# Allegro board fmc_tlu_v1_15.brd
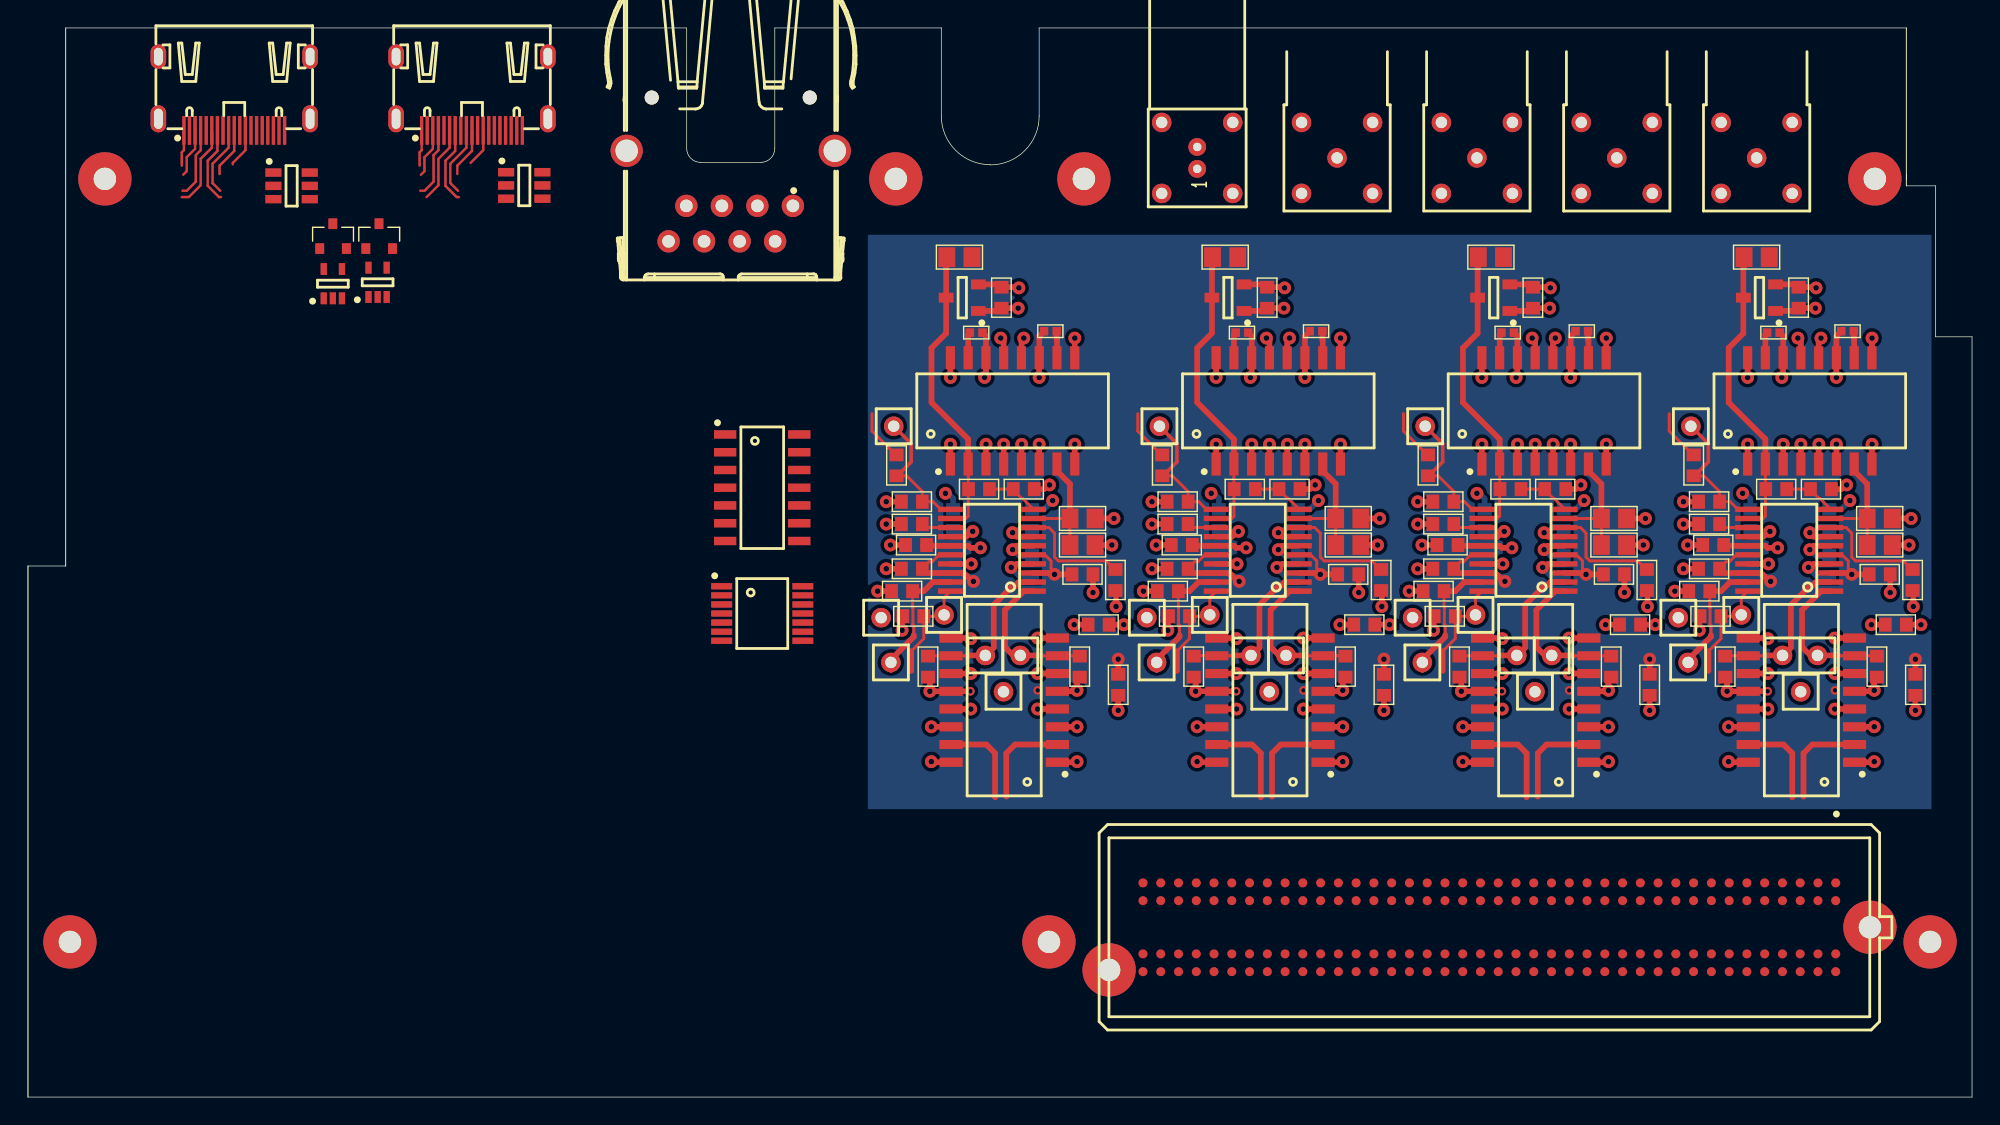
[diagram p0: board, top side]
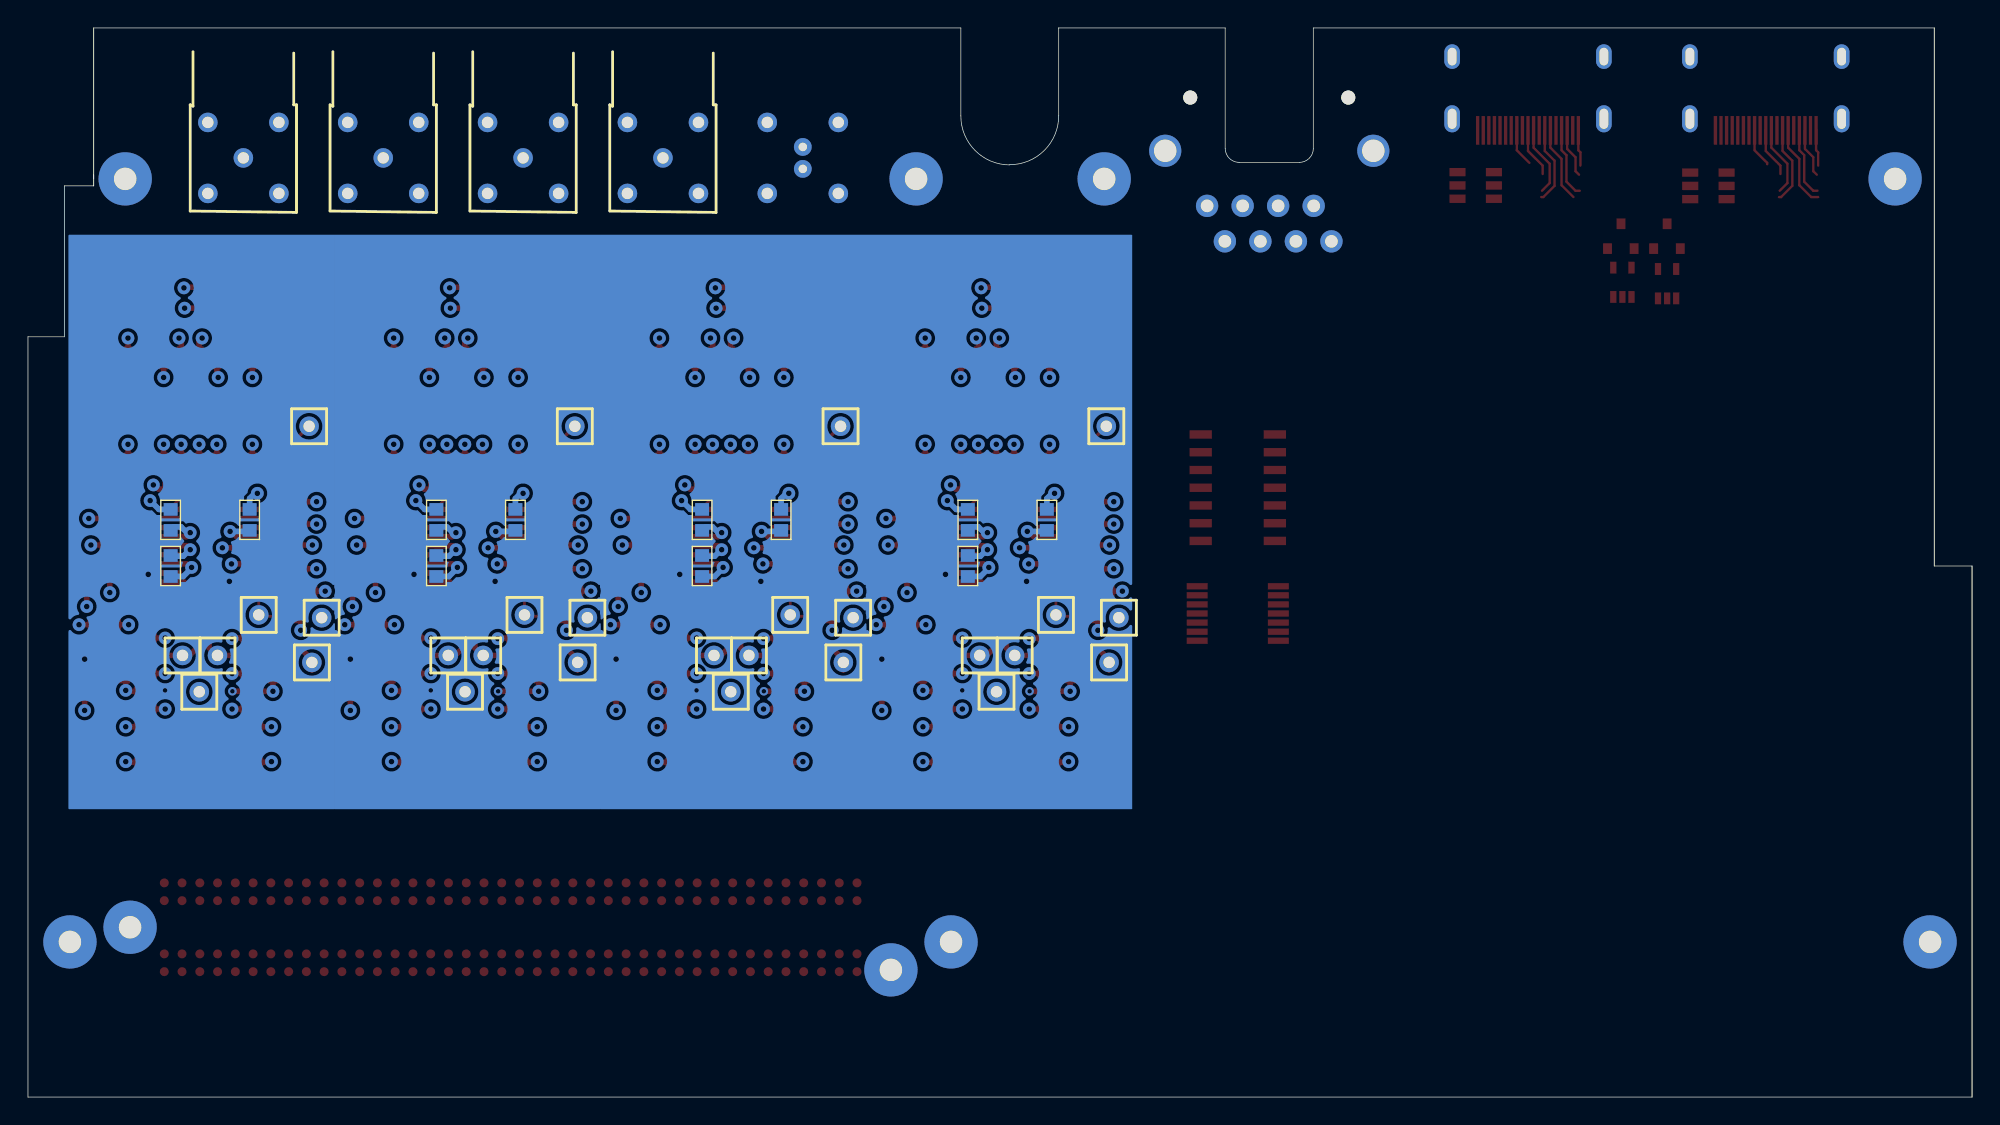
[diagram p1: board, bottom side, seen from below]

Outline 139 x 76.5 mm; copper layers: TOP, LAYER2, LAYER3, LAYER4, LAYER5, BOTTOM. Coordinates in mm from the lower left corner of the outline.
Outline path: 0,38 0,0 ; 0,38 2.7,38 ; 0,38 0,0 ; 0,0 139,0 139,54.4 136.4,54.4 136.4,65.2 134.3,65.2 ; 2.7,38 2.7,76.5 ; 2.7,38 2.7,76.5 ; 2.7,76.5 47.1,76.5 47.1,67.88 arc(47.39,67.17) 48.1,66.88 52.4,66.88 arc(53.1,67.17) 53.4,67.88 53.4,76.5 65.3,76.5 65.3,70.21 arc(66.33,67.74) 68.81,66.72 ; 134.3,76.5 72.3,76.5 72.3,70.2 arc(71.27,67.73) 68.8,66.7 ; 134.3,76.5 134.3,65.7 ; 134.3,76.5 134.3,65.2 ; 134.3,65.2 134.3,66

## Design rules (mm)
constraint set DEFAULT: min track width 0.17, pair gap 0.18
net group BEAM_TRIGGER: nets BEAM_TRIGGER<0> BEAM_TRIGGER<1> BEAM_TRIGGER<2> BEAM_TRIGGER<3>
net group BEAM_TRIGGER*: nets BEAM_TRIGGER*<0> BEAM_TRIGGER*<1> BEAM_TRIGGER*<2> BEAM_TRIGGER*<3>
net group BEAM_TRIGGER_CFD: nets BEAM_TRIGGER_CFD<0> BEAM_TRIGGER_CFD<1> BEAM_TRIGGER_CFD<2> BEAM_TRIGGER_CFD<3>
net group BEAM_TRIGGER_CFD*: nets BEAM_TRIGGER_CFD*<0> BEAM_TRIGGER_CFD*<1> BEAM_TRIGGER_CFD*<2> BEAM_TRIGGER_CFD*<3>
net group FMC_LA: nets FMC_LA<0> FMC_LA<1> FMC_LA<2> FMC_LA<3> FMC_LA<4> FMC_LA<5> FMC_LA<6> FMC_LA<7> FMC_LA<8> FMC_LA<9> FMC_LA<10> FMC_LA<11> FMC_LA<12> FMC_LA<13> FMC_LA<14> FMC_LA<15> FMC_LA<16> FMC_LA<17> FMC_LA<18> FMC_LA<19> FMC_LA<20> FMC_LA<21> FMC_LA<22> FMC_LA<23> FMC_LA<24> FMC_LA<25> FMC_LA<26> FMC_LA<27> FMC_LA<28> FMC_LA<29> FMC_LA<30> FMC_LA<31> FMC_LA<32> FMC_LA<33>
net group FMC_LA*: nets FMC_LA*<0> FMC_LA*<1> FMC_LA*<2> FMC_LA*<3> FMC_LA*<4> FMC_LA*<5> FMC_LA*<6> FMC_LA*<7> FMC_LA*<8> FMC_LA*<9> FMC_LA*<10> FMC_LA*<11> FMC_LA*<12> FMC_LA*<13> FMC_LA*<14> FMC_LA*<15> FMC_LA*<16> FMC_LA*<17> FMC_LA*<18> FMC_LA*<19> FMC_LA*<20> FMC_LA*<21> FMC_LA*<22> FMC_LA*<23> FMC_LA*<24> FMC_LA*<25> FMC_LA*<26> FMC_LA*<27> FMC_LA*<28> FMC_LA*<29> FMC_LA*<30> FMC_LA*<31> FMC_LA*<32> FMC_LA*<33>
net group IN: nets IN<0> IN<1> IN<2> IN<3>
net group VTHRESH: nets VTHRESH<0> VTHRESH<1> VTHRESH<2> VTHRESH<3>

## Placement (name value [footprint] x y rotation side)
C1_1  100nF  [C0603]  69.6 57.2 90 top
C1_2  100nF  [C0603]  88.6 57.2 90 top
C1_3  100nF  [C0603]  107.6 57.2 90 top
C1_4  100nF  [C0603]  126.6 57.2 90 top
C2_1  10nF  [C0603]  63.2 42.6 0 top
C2_2  10nF  [C0603]  82.2 42.6 0 top
C2_3  10nF  [C0603]  101.2 42.6 0 top
C2_4  10nF  [C0603]  120.2 42.6 0 top
C3_1  1.0uF  [C0603]  77.95 29.5 90 top
C3_2  1.0uF  [C0603]  96.95 29.5 90 top
C3_3  1.0uF  [C0603]  115.95 29.5 90 top
C3_4  1.0uF  [C0603]  134.95 29.5 90 top
C4_1  1.0uF  [C0603]  76.55 33.8 0 top
C4_2  1.0uF  [C0603]  95.55 33.8 0 top
C4_3  1.0uF  [C0603]  114.55 33.8 0 top
C4_4  1.0uF  [C0603]  133.55 33.8 0 top
C5_1  100nF  [C0603]  75.4 37.4 180 top
C5_2  100nF  [C0603]  94.4 37.4 180 top
C5_3  100nF  [C0603]  113.4 37.4 180 top
C5_4  100nF  [C0603]  132.4 37.4 180 top
C6_1  1.0uF  [C0603]  63.5 39.5 0 top
C6_2  1.0uF  [C0603]  82.5 39.5 0 top
C6_3  1.0uF  [C0603]  101.5 39.5 0 top
C6_4  1.0uF  [C0603]  120.5 39.5 0 top
C7_1  100nF  [C0603]  71.8 41.3 270 bottom
C7_2  100nF  [C0603]  90.8 41.3 270 bottom
C7_3  100nF  [C0603]  109.8 41.3 270 bottom
C7_4  100nF  [C0603]  128.8 41.3 270 bottom
C8_1  100nF  [C0603]  63.2 37.8 0 top
C8_2  100nF  [C0603]  82.2 37.8 0 top
C8_3  100nF  [C0603]  101.2 37.8 0 top
C8_4  100nF  [C0603]  120.2 37.8 0 top
C9_1  100nF  [C0603]  71.8 38 90 bottom
C9_2  100nF  [C0603]  90.8 38 90 bottom
C9_3  100nF  [C0603]  109.8 38 90 bottom
C9_4  100nF  [C0603]  128.8 38 90 bottom
C10_1  100nF  [C0603]  66.15 41.3 270 bottom
C10_2  100nF  [C0603]  85.15 41.3 270 bottom
C10_3  100nF  [C0603]  104.15 41.3 270 bottom
C10_4  100nF  [C0603]  123.15 41.3 270 bottom
D1_1  -  [SOT95P240X130-3N]  66.8 57.2 180 top
D1_2  -  [SOT95P240X130-3N]  85.8 57.2 180 top
D1_3  -  [SOT95P240X130-3N]  104.8 57.2 180 top
D1_4  -  [SOT95P240X130-3N]  123.8 57.2 180 top
IC1  -  [SOP65P640X120-14N]  52.5 34.6 0 top
IC1_1  -  [SOIC127P835X237-16N]  70.4 49.1 90 top
IC1_2  -  [SOIC127P835X237-16N]  89.4 49.1 90 top
IC1_3  -  [SOIC127P835X237-16N]  108.4 49.1 90 top
IC1_4  -  [SOIC127P835X237-16N]  127.4 49.1 90 top
IC2  -  [SOIC127P600X175-14N]  52.5 43.6 0 top
IC2_1  -  [TSSOP20MA_065]  71.9 36.2 90 top
IC2_2  -  [TSSOP20MA_065]  90.9 36.2 90 top
IC2_3  -  [TSSOP20MA_065]  109.9 36.2 90 top
IC2_4  -  [TSSOP20MA_065]  128.9 36.2 90 top
IC3  -  [SOT95P280X145-6N]  18.85 65.2 0 top
IC3_1  -  [SOIC127P835X237-16N]  69.8 28.4 180 top
IC3_2  -  [SOIC127P835X237-16N]  88.8 28.4 180 top
IC3_3  -  [SOIC127P835X237-16N]  107.8 28.4 180 top
IC3_4  -  [SOIC127P835X237-16N]  126.8 28.4 180 top
IC4  -  [SOT65P210X110-5N]  21.8 58.2 90 top
IC5  -  [SOT95P280X145-6N]  35.49 65.23 0 top
IC6  -  [SOT65P210X110-5N]  25 58.3 90 top
J1  -  [SAMTEC_MHDMI-19]  14.75 69.17 0 top
J2  -  [SAMTEC_MHDMI-19]  31.75 69.17 0 top
J3  -  [MOLEX_44661-1011]  50.25 68.86 270 top
J4  -  [SAMTEC_ASP-134606-01]  104.49 12.15 0 top
NOREF  -  [unnamed]  136 11.1 0 top
NOREF#2  -  [unnamed]  131.7 12.15 0 top
NOREF#3  -  [unnamed]  132.05 65.7 0 top
NOREF#4  -  [unnamed]  73 11.1 0 top
NOREF#5  -  [unnamed]  5.5 65.7 0 top
NOREF#6  -  [unnamed]  75.5 65.7 0 top
NOREF#7  -  [unnamed]  62.05 65.7 0 top
NOREF#8  -  [unnamed]  77.3 9.1 0 top
NOREF#9  -  [unnamed]  3 11.1 0 top
PX1  -  [LEMOEPG00_302]  83.6 66.56 90 top
PX2  -  [PLEMO80]  93.6 67.2 90 top
PX3  -  [PLEMO80]  103.6 67.2 90 top
PX4  -  [PLEMO80]  113.6 67.2 90 top
PX5  -  [PLEMO80]  123.6 67.2 90 top
R1_1  51  [C0402]  67.8 54.7 180 top
R1_2  51  [C0402]  86.8 54.7 180 top
R1_3  51  [C0402]  105.8 54.7 180 top
R1_4  51  [C0402]  124.8 54.7 180 top
R2_1  12  [C0805]  66.6 60.1 180 top
R2_2  12  [C0805]  85.6 60.1 180 top
R2_3  12  [C0805]  104.6 60.1 180 top
R2_4  12  [C0805]  123.6 60.1 180 top
R3_1  51  [C0603]  68 43.5 0 top
R3_2  51  [C0603]  87 43.5 0 top
R3_3  51  [C0603]  106 43.5 0 top
R3_4  51  [C0603]  125 43.5 0 top
R4_1  51  [C0402]  73.1 54.8 0 top
R4_2  51  [C0402]  92.1 54.8 0 top
R4_3  51  [C0402]  111.1 54.8 0 top
R4_4  51  [C0402]  130.1 54.8 0 top
R5_1  100  [C0603]  62.1 45.2 270 top
R5_2  100  [C0603]  81.1 45.2 270 top
R5_3  100  [C0603]  100.1 45.2 270 top
R5_4  100  [C0603]  119.1 45.2 270 top
R6_1  100  [C0805]  75.4 41.4 180 top
R6_2  100  [C0805]  94.4 41.4 180 top
R6_3  100  [C0805]  113.4 41.4 180 top
R6_4  100  [C0805]  132.4 41.4 180 top
R7_1  100  [C0603]  71.2 43.5 180 top
R7_2  100  [C0603]  90.2 43.5 180 top
R7_3  100  [C0603]  109.2 43.5 180 top
R7_4  100  [C0603]  128.2 43.5 180 top
R8_1  100  [C0805]  75.4 39.5 180 top
R8_2  100  [C0805]  94.4 39.5 180 top
R8_3  100  [C0805]  113.4 39.5 180 top
R8_4  100  [C0805]  132.4 39.5 180 top
R9_1  33k  [C0603]  63.2 41 0 top
R9_2  33k  [C0603]  82.2 41 0 top
R9_3  33k  [C0603]  101.2 41 0 top
R9_4  33k  [C0603]  120.2 41 0 top
R10_1  XX  [C0603]  77.75 37 90 top
R10_2  XX  [C0603]  96.75 37 90 top
R10_3  XX  [C0603]  115.75 37 90 top
R10_4  XX  [C0603]  134.75 37 90 top
R11_1  75  [C0603]  62.5 36.2 0 top
R11_2  75  [C0603]  81.5 36.2 0 top
R11_3  75  [C0603]  100.5 36.2 0 top
R11_4  75  [C0603]  119.5 36.2 0 top
R12_1  75  [C0603]  64.35 30.8 90 top
R12_2  75  [C0603]  83.35 30.8 90 top
R12_3  75  [C0603]  102.35 30.8 90 top
R12_4  75  [C0603]  121.35 30.8 90 top
R13_1  75  [C0603]  63.3 34.4 0 top
R13_2  75  [C0603]  82.3 34.4 0 top
R13_3  75  [C0603]  101.3 34.4 0 top
R13_4  75  [C0603]  120.3 34.4 0 top
R14_1  75  [C0603]  75.2 30.8 90 top
R14_2  75  [C0603]  94.2 30.8 90 top
R14_3  75  [C0603]  113.2 30.8 90 top
R14_4  75  [C0603]  132.2 30.8 90 top
T1  -  [SOT23]  21.8 61.6 90 top
T2  -  [SOT23]  25.1 61.6 90 top
TP1_1  -  [TP_HOLE_08]  61.9 48 0 top
TP1_2  -  [TP_HOLE_08]  80.9 48 0 top
TP1_3  -  [TP_HOLE_08]  99.9 48 0 top
TP1_4  -  [TP_HOLE_08]  118.9 48 0 top
TP2_1  -  [TP_HOLE_08]  65.5 34.5 0 top
TP2_2  -  [TP_HOLE_08]  84.5 34.5 0 top
TP2_3  -  [TP_HOLE_08]  103.5 34.5 0 top
TP2_4  -  [TP_HOLE_08]  122.5 34.5 0 top
TP3_1  -  [TP_HOLE_08]  61.7 31.1 0 top
TP3_2  -  [TP_HOLE_08]  80.7 31.1 0 top
TP3_3  -  [TP_HOLE_08]  99.7 31.1 0 top
TP3_4  -  [TP_HOLE_08]  118.7 31.1 0 top
TP4_1  -  [TP_HOLE_08]  61 34.3 0 top
TP4_2  -  [TP_HOLE_08]  80 34.3 0 top
TP4_3  -  [TP_HOLE_08]  99 34.3 0 top
TP4_4  -  [TP_HOLE_08]  118 34.3 0 top
TP5_1  -  [TP_HOLE_08]  70.95 31.6 0 top
TP5_2  -  [TP_HOLE_08]  89.95 31.6 0 top
TP5_3  -  [TP_HOLE_08]  108.95 31.6 0 top
TP5_4  -  [TP_HOLE_08]  127.95 31.6 0 top
TP6_1  -  [TP_HOLE_08]  68.45 31.6 0 top
TP6_2  -  [TP_HOLE_08]  87.45 31.6 0 top
TP6_3  -  [TP_HOLE_08]  106.45 31.6 0 top
TP6_4  -  [TP_HOLE_08]  125.45 31.6 0 top
TP7_1  -  [TP_HOLE_08]  69.75 29 0 top
TP7_2  -  [TP_HOLE_08]  88.75 29 0 top
TP7_3  -  [TP_HOLE_08]  107.75 29 0 top
TP7_4  -  [TP_HOLE_08]  126.75 29 0 top

## Library data of the parts
C1_1-C1_4 C5_1-C5_4 C7_1-C7_4 C8_1-C8_4 C9_1-C9_4 C10_1-C10_4 = CAPCERSMDCL2: part number: CAPCERSMDCL2_0603-100NF,16V; tolerance: 10%
C2_1-C2_4 = CAPCERSMDCL2: part number: CAPCERSMDCL2_0603-10NF,50V; tolerance: 10%
C3_1-C3_4 C4_1-C4_4 C6_1-C6_4 = CAPCERSMDCL2: part number: CAPCERSMDCL2_0603-1.0UF,6.3V; tolerance: 10%
D1_1-D1_4 = DIODE_DUAL_SERIES: part number: HBAT-540C
IC1 = AD5665R: part number: AD5665RBRUZ-1
IC1_1-IC1_4 = DELAY_LINE_GL2L: part number: GL2L5LS050D-C
IC2 = OPA4277: part number: OPA4277UA
IC2_1-IC2_4 = MAX9601
IC3 IC5 = USBLC6-2: part number: USBLC6-2SC6
IC3_1-IC3_4 = DELAY_LINE_GL2L: part number: GL2L5LS100D-C
IC4 IC6 = 74LVC1G07: part number: SN74LVC1G07DCK
J1 J2 = CON19P: part number: MHDMI-19-02-H-TH-L-TR
J3 = CON8P: part number: CON8P-MOLEX_44661-1011
J4 = CON160P_40CDGH: part number: ASP-134606-01
PX1 = PLEMO2CI: part number: PLEMO2CI-PLEMO2-00B
PX2-PX5 = PCOAX: part number: PCOAX-PLEMO00C
R1_1-R1_4 R4_1-R4_4 = RSMD0402: part number: RSMD0402_1/16W-51,1%; tolerance: 1%
R2_1-R2_4 = RSMD0805: part number: RSMD0805_125MW-12,1%; tolerance: 1%
R3_1-R3_4 = RSMD0603: part number: RSMD0603_1/10W-51,1%; tolerance: 1%
R5_1-R5_4 R7_1-R7_4 = RSMD0603: part number: RSMD0603_1/10W-100,1%; tolerance: 1%
R6_1-R6_4 R8_1-R8_4 = RSMD0805: part number: RSMD0805_125MW-100,1%; tolerance: 1%
R9_1-R9_4 = RSMD0603: part number: RSMD0603_1/10W-33K,1%; tolerance: 1%
R10_1-R10_4 = RSMD0603: part number: RSMD0603_1/10W-XX,1%; tolerance: 1%
R11_1-R11_4 R12_1-R12_4 R13_1-R13_4 R14_1-R14_4 = RSMD0603: part number: RSMD0603_1/10W-75,1%; tolerance: 1%
T1 T2 = TRANS MOSFET: part number: TRANS MOSFET_GSD-FDV301N,SOT23
TP1_1-TP1_4 TP2_1-TP2_4 TP3_1-TP3_4 TP4_1-TP4_4 TP5_1-TP5_4 TP6_1-TP6_4 TP7_1-TP7_4 = TP: part number: TP_HOLE-0.8MM

## Footprints (pads in the part's own frame, mm; a bottom-side part is the same pattern mirrored in y, then rotated)
C0402
  rect 0.6x0.6 smd: 1(-0.45,0) 2(0.45,0)
C0603
  rect 0.9x1 smd: 1(-0.75,0) 2(0.75,0)
C0805
  rect 1.2x1.4 smd: 1(-0.9,0) 2(0.9,0)
LEMOEPG00_302
  round 1.27 hole 0.6: 1(-0.15,0) 2(1.42,0)
  round 1.397 hole 0.813: 3(-1.905,-2.54) 4(3.175,-2.54) 5(3.175,2.54) 6(-1.905,2.54)
MOLEX_44661-1011
  round 1 hole 3.25 unplated: (-2.66,5.65) (-2.66,-5.65)
  round 1.6 hole 0.9: 1(5.09,4.445) 2(7.63,3.175) 3(5.09,1.905) 4(7.63,0.635) 5(5.09,-0.635) 6(7.63,-1.905) 7(5.09,-3.175) 8(7.63,-4.445)
  round 2.301 hole 1.6: 9(1.15,7.44) 10(1.15,-7.44)
PLEMO80
  round 1.397 hole 0.813: 1(0,0) 2(2.54,-2.54) 3(2.54,2.54) 4(-2.54,2.54) 5(-2.54,-2.54)
SAMTEC_ASP-134606-01
  round 1.001 hole 1.3 unplated: (-27.19,-3.05) (27.19,0)
  round 0.64 smd: C1(24.765,3.175) C2(23.495,3.175) C3(22.225,3.175) C4(20.955,3.175) C5(19.685,3.175) C6(18.415,3.175) C7(17.145,3.175) C8(15.875,3.175) C9(14.605,3.175) C10(13.335,3.175) C11(12.065,3.175) C12(10.795,3.175) C13(9.525,3.175) C14(8.255,3.175) C15(6.985,3.175) C16(5.715,3.175) C17(4.445,3.175) C18(3.175,3.175) C19(1.905,3.175) C20(0.635,3.175) C21(-0.635,3.175) C22(-1.905,3.175) C23(-3.175,3.175) C24(-4.445,3.175) C25(-5.715,3.175) C26(-6.985,3.175) C27(-8.255,3.175) C28(-9.525,3.175) C29(-10.795,3.175) C30(-12.065,3.175) C31(-13.335,3.175) C32(-14.605,3.175) C33(-15.875,3.175) C34(-17.145,3.175) C35(-18.415,3.175) C36(-19.685,3.175) C37(-20.955,3.175) C38(-22.225,3.175) C39(-23.495,3.175) C40(-24.765,3.175) D1(24.765,1.905) D2(23.495,1.905) D3(22.225,1.905) D4(20.955,1.905) D5(19.685,1.905) D6(18.415,1.905) D7(17.145,1.905) D8(15.875,1.905) D9(14.605,1.905) D10(13.335,1.905) D11(12.065,1.905) D12(10.795,1.905) D13(9.525,1.905) D14(8.255,1.905) D15(6.985,1.905) D16(5.715,1.905) D17(4.445,1.905) D18(3.175,1.905) D19(1.905,1.905) D20(0.635,1.905) D21(-0.635,1.905) D22(-1.905,1.905) D23(-3.175,1.905) D24(-4.445,1.905) D25(-5.715,1.905) D26(-6.985,1.905) D27(-8.255,1.905) D28(-9.525,1.905) D29(-10.795,1.905) D30(-12.065,1.905) D31(-13.335,1.905) D32(-14.605,1.905) D33(-15.875,1.905) D34(-17.145,1.905) D35(-18.415,1.905) D36(-19.685,1.905) D37(-20.955,1.905) D38(-22.225,1.905) D39(-23.495,1.905) D40(-24.765,1.905) G1(24.765,-1.905) G2(23.495,-1.905) G3(22.225,-1.905) G4(20.955,-1.905) G5(19.685,-1.905) G6(18.415,-1.905) G7(17.145,-1.905) G8(15.875,-1.905) G9(14.605,-1.905) G10(13.335,-1.905) G11(12.065,-1.905) G12(10.795,-1.905) G13(9.525,-1.905) G14(8.255,-1.905) G15(6.985,-1.905) G16(5.715,-1.905) G17(4.445,-1.905) G18(3.175,-1.905) G19(1.905,-1.905) G20(0.635,-1.905) G21(-0.635,-1.905) G22(-1.905,-1.905) G23(-3.175,-1.905) G24(-4.445,-1.905) G25(-5.715,-1.905) G26(-6.985,-1.905) G27(-8.255,-1.905) G28(-9.525,-1.905) G29(-10.795,-1.905) G30(-12.065,-1.905) G31(-13.335,-1.905) G32(-14.605,-1.905) G33(-15.875,-1.905) G34(-17.145,-1.905) G35(-18.415,-1.905) G36(-19.685,-1.905) G37(-20.955,-1.905) G38(-22.225,-1.905) G39(-23.495,-1.905) G40(-24.765,-1.905) H1(24.765,-3.175) H2(23.495,-3.175) H3(22.225,-3.175) H4(20.955,-3.175) H5(19.685,-3.175) H6(18.415,-3.175) H7(17.145,-3.175) H8(15.875,-3.175) H9(14.605,-3.175) H10(13.335,-3.175) H11(12.065,-3.175) H12(10.795,-3.175) H13(9.525,-3.175) H14(8.255,-3.175) H15(6.985,-3.175) H16(5.715,-3.175) H17(4.445,-3.175) H18(3.175,-3.175) H19(1.905,-3.175) H20(0.635,-3.175) H21(-0.635,-3.175) H22(-1.905,-3.175) H23(-3.175,-3.175) H24(-4.445,-3.175) H25(-5.715,-3.175) H26(-6.985,-3.175) H27(-8.255,-3.175) H28(-9.525,-3.175) H29(-10.795,-3.175) H30(-12.065,-3.175) H31(-13.335,-3.175) H32(-14.605,-3.175) H33(-15.875,-3.175) H34(-17.145,-3.175) H35(-18.415,-3.175) H36(-19.685,-3.175) H37(-20.955,-3.175) H38(-22.225,-3.175) H39(-23.495,-3.175) H40(-24.765,-3.175)
SAMTEC_MHDMI-19
  rect 0.24x2.05 smd: 1(-3.6,0) 2(-3.2,0) 3(-2.8,0) 4(-2.4,0) 5(-2,0) 6(-1.6,0) 7(-1.2,0) 8(-0.8,0) 9(-0.4,0) 10(0,0) 11(0.4,0) 12(0.8,0) 13(1.2,0) 14(1.6,0) 15(2,0) 16(2.4,0) 17(2.8,0) 18(3.2,0) 19(3.6,0)
  oval 1.12x1.94 hole 0.62x1.44: 20(-5.425,0.83) 21(5.425,0.83)
  oval 1.12x1.76 hole 0.62x1.26: 22(-5.425,5.28) 23(5.425,5.28)
SOIC127P600X175-14N
  rect 1.6x0.6 smd: 1(-2.65,3.81) 2(-2.65,2.54) 3(-2.65,1.27) 4(-2.65,0) 5(-2.65,-1.27) 6(-2.65,-2.54) 7(-2.65,-3.81) 8(2.65,-3.81) 9(2.65,-2.54) 10(2.65,-1.27) 11(2.65,0) 12(2.65,1.27) 13(2.65,2.54) 14(2.65,3.81)
SOIC127P835X237-16N
  rect 1.65x0.65 smd: 1(-3.8,4.445) 2(-3.8,3.175) 3(-3.8,1.905) 4(-3.8,0.635) 5(-3.8,-0.635) 6(-3.8,-1.905) 7(-3.8,-3.175) 8(-3.8,-4.445) 9(3.8,-4.445) 10(3.8,-3.175) 11(3.8,-1.905) 12(3.8,-0.635) 13(3.8,0.635) 14(3.8,1.905) 15(3.8,3.175) 16(3.8,4.445)
SOP65P640X120-14N
  rect 1.5x0.45 smd: 1(-2.9,1.95) 2(-2.9,1.3) 3(-2.9,0.65) 4(-2.9,0) 5(-2.9,-0.65) 6(-2.9,-1.3) 7(-2.9,-1.95) 8(2.9,-1.95) 9(2.9,-1.3) 10(2.9,-0.65) 11(2.9,0) 12(2.9,0.65) 13(2.9,1.3) 14(2.9,1.95)
SOT23
  rect 0.762x0.635 smd: 1(-0.889,0.94) 2(-0.889,-0.965) 3(0.889,0)
SOT65P210X110-5N
  rect 0.85x0.45 smd: 1(-1.05,0.65) 2(-1.05,0) 3(-1.05,-0.65) 4(1.05,-0.65) 5(1.05,0.65)
SOT95P240X130-3N
  rect 1.05x0.7 smd: 1(-1.15,0.95) 2(-1.15,-0.95) 3(1.15,0)
SOT95P280X145-6N
  rect 1.15x0.6 smd: 1(-1.3,0.95) 2(-1.3,0) 3(-1.3,-0.95) 4(1.3,-0.95) 5(1.3,0) 6(1.3,0.95)
TP_HOLE_08
  round 1.397 hole 0.813: 1(0,0)
TSSOP20MA_065
  rect 0.381x1.778 smd: 1(0,0) 2(0.65,0) 3(1.3,0) 4(1.95,0) 5(2.6,0) 6(3.25,0) 7(3.9,0) 8(4.55,0) 9(5.2,0) 10(5.85,0) 11(5.85,5.94) 12(5.2,5.94) 13(4.55,5.94) 14(3.9,5.94) 15(3.25,5.94) 16(2.6,5.94) 17(1.95,5.94) 18(1.3,5.94) 19(0.65,5.94) 20(0,5.94)
unnamed
  round 3.81 hole 1.6: (0,0)

## Nets
GND_HDMI1: J1.20 J1.21 J1.22 J1.23
GND_HDMI2: J2.20 J2.21 J2.22 J2.23
GND_SIGNAL: C2_1.1(A<0>) C2_2.1(A<0>) C2_3.1(A<0>) C2_4.1(A<0>) C3_1.1(A<0>) C3_2.1(A<0>) C3_3.1(A<0>) C3_4.1(A<0>) C4_1.1(A<0>) C4_2.1(A<0>) C4_3.1(A<0>) C4_4.1(A<0>) C5_1.1(A<0>) C5_2.1(A<0>) C5_3.1(A<0>) C5_4.1(A<0>) C6_1.1(A<0>) C6_2.1(A<0>) C6_3.1(A<0>) C6_4.1(A<0>) C7_1.1(A<0>) C7_2.1(A<0>) C7_3.1(A<0>) C7_4.1(A<0>) C8_1.1(A<0>) C8_2.1(A<0>) C8_3.1(A<0>) C8_4.1(A<0>) C9_1.1(A<0>) C9_2.1(A<0>) C9_3.1(A<0>) C9_4.1(A<0>) C10_1.1(A<0>) C10_2.1(A<0>) C10_3.1(A<0>) C10_4.1(A<0>) IC1.1(LDAC*) IC1.2(ADDR1) IC1.8(ADDR2) IC1.12 IC1_1.1(SH<0>) IC1_1.3(SH<1>) IC1_1.4(SH<2>) IC1_1.5(SH<3>) IC1_1.6(SH<4>) IC1_1.8(SH<5>) IC1_1.9(SH<6>) IC1_1.11(SH<7>) IC1_1.12(SH<8>) IC1_1.13(SH<9>) IC1_1.14(SH<10>) IC1_1.16(SH<11>) IC1_2.1(SH<0>) IC1_2.3(SH<1>) IC1_2.4(SH<2>) IC1_2.5(SH<3>) IC1_2.6(SH<4>) IC1_2.8(SH<5>) IC1_2.9(SH<6>) IC1_2.11(SH<7>) IC1_2.12(SH<8>) IC1_2.13(SH<9>) IC1_2.14(SH<10>) IC1_2.16(SH<11>) IC1_3.1(SH<0>) IC1_3.3(SH<1>) IC1_3.4(SH<2>) IC1_3.5(SH<3>) IC1_3.6(SH<4>) IC1_3.8(SH<5>) IC1_3.9(SH<6>) IC1_3.11(SH<7>) IC1_3.12(SH<8>) IC1_3.13(SH<9>) IC1_3.14(SH<10>) IC1_3.16(SH<11>) IC1_4.1(SH<0>) IC1_4.3(SH<1>) IC1_4.4(SH<2>) IC1_4.5(SH<3>) IC1_4.6(SH<4>) IC1_4.8(SH<5>) IC1_4.9(SH<6>) IC1_4.11(SH<7>) IC1_4.12(SH<8>) IC1_4.13(SH<9>) IC1_4.14(SH<10>) IC1_4.16(SH<11>) IC2_1.4(LE<0>) IC2_1.17(LE<0>) IC2_2.4(LE<0>) IC2_2.17(LE<0>) IC2_3.4(LE<0>) IC2_3.17(LE<0>) IC2_4.4(LE<0>) IC2_4.17(LE<0>) IC3.2(GND) IC3_1.1(SH<0>) IC3_1.3(SH<1>) IC3_1.4(SH<2>) IC3_1.5(SH<3>) IC3_1.6(SH<4>) IC3_1.8(SH<5>) IC3_1.9(SH<6>) IC3_1.11(SH<7>) IC3_1.12(SH<8>) IC3_1.13(SH<9>) IC3_1.14(SH<10>) IC3_1.16(SH<11>) IC3_2.1(SH<0>) IC3_2.3(SH<1>) IC3_2.4(SH<2>) IC3_2.5(SH<3>) IC3_2.6(SH<4>) IC3_2.8(SH<5>) IC3_2.9(SH<6>) IC3_2.11(SH<7>) IC3_2.12(SH<8>) IC3_2.13(SH<9>) IC3_2.14(SH<10>) IC3_2.16(SH<11>) IC3_3.1(SH<0>) IC3_3.3(SH<1>) IC3_3.4(SH<2>) IC3_3.5(SH<3>) IC3_3.6(SH<4>) IC3_3.8(SH<5>) IC3_3.9(SH<6>) IC3_3.11(SH<7>) IC3_3.12(SH<8>) IC3_3.13(SH<9>) IC3_3.14(SH<10>) IC3_3.16(SH<11>) IC3_4.1(SH<0>) IC3_4.3(SH<1>) IC3_4.4(SH<2>) IC3_4.5(SH<3>) IC3_4.6(SH<4>) IC3_4.8(SH<5>) IC3_4.9(SH<6>) IC3_4.11(SH<7>) IC3_4.12(SH<8>) IC3_4.13(SH<9>) IC3_4.14(SH<10>) IC3_4.16(SH<11>) IC4.3 IC5.2(GND) IC6.3 J1.2(A<1>) J1.5(A<4>) J1.8(A<7>) J1.11(A<10>) J1.17(A<16>) J2.2(A<1>) J2.5(A<4>) J2.8(A<7>) J2.11(A<10>) J2.17(A<16>) J4.C1(C<1>) J4.C4(C<4>) J4.C5(C<5>) J4.C8(C<8>) J4.C9(C<9>) J4.C12(C<12>) J4.C13(C<13>) J4.C16(C<16>) J4.C17(C<17>) J4.C20(C<20>) J4.C21(C<21>) J4.C24(C<24>) J4.C25(C<25>) J4.C28(C<28>) J4.C29(C<29>) J4.C32(C<32>) J4.C33(C<33>) J4.C36(C<36>) J4.C38(C<38>) J4.C40(C<40>) J4.D2(D<2>) J4.D3(D<3>) J4.D6(D<6>) J4.D7(D<7>) J4.D10(D<10>) J4.D13(D<13>) J4.D16(D<16>) J4.D19(D<19>) J4.D22(D<22>) J4.D25(D<25>) J4.D28(D<28>) J4.D37(D<37>) J4.D39(D<39>) J4.G1(G<1>) J4.G4(G<4>) J4.G5(G<5>) J4.G8(G<8>) J4.G11(G<11>) J4.G14(G<14>) J4.G17(G<17>) J4.G20(G<20>) J4.G23(G<23>) J4.G26(G<26>) J4.G29(G<29>) J4.G32(G<32>) J4.G35(G<35>) J4.G38(G<38>) J4.G40(G<40>) J4.H3(H<3>) J4.H6(H<6>) J4.H9(H<9>) J4.H12(H<12>) J4.H15(H<15>) J4.H18(H<18>) J4.H21(H<21>) J4.H24(H<24>) J4.H27(H<27>) J4.H30(H<30>) J4.H33(H<33>) J4.H36(H<36>) J4.H39(H<39>) PX1.3 PX1.4 PX1.5 PX1.6 PX2.2 PX2.3 PX2.4 PX2.5 PX3.2 PX3.3 PX3.4 PX3.5 PX4.2 PX4.3 PX4.4 PX4.5 PX5.2 PX5.3 PX5.4 PX5.5 R1_1.1(A<0>) R1_2.1(A<0>) R1_3.1(A<0>) R1_4.1(A<0>) R4_1.1(A<0>) R4_2.1(A<0>) R4_3.1(A<0>) R4_4.1(A<0>) R6_1.1(A<0>) R6_2.1(A<0>) R6_3.1(A<0>) R6_4.1(A<0>) R7_1.1(A<0>) R7_2.1(A<0>) R7_3.1(A<0>) R7_4.1(A<0>) R8_1.1(A<0>) R8_2.1(A<0>) R8_3.1(A<0>) R8_4.1(A<0>) R9_1.1(A<0>) R9_2.1(A<0>) R9_3.1(A<0>) R9_4.1(A<0>) R10_1.1(A<0>) R10_2.1(A<0>) R10_3.1(A<0>) R10_4.1(A<0>) R11_1.1(A<0>) R11_2.1(A<0>) R11_3.1(A<0>) R11_4.1(A<0>) R12_1.1(A<0>) R12_2.1(A<0>) R12_3.1(A<0>) R12_4.1(A<0>) R13_1.1(A<0>) R13_2.1(A<0>) R13_3.1(A<0>) R13_4.1(A<0>) R14_1.1(A<0>) R14_2.1(A<0>) R14_3.1(A<0>) R14_4.1(A<0>) TP4_1.1(A<0>) TP4_2.1(A<0>) TP4_3.1(A<0>) TP4_4.1(A<0>) TP7_1.1(A<0>) TP7_2.1(A<0>) TP7_3.1(A<0>) TP7_4.1(A<0>)
P2V5: C3_1.2(B<0>) C3_2.2(B<0>) C3_3.2(B<0>) C3_4.2(B<0>) C5_1.2(B<0>) C5_2.2(B<0>) C5_3.2(B<0>) C5_4.2(B<0>) C8_1.2(B<0>) C8_2.2(B<0>) C8_3.2(B<0>) C8_4.2(B<0>) IC2_1.3(VCCO_<0>) IC2_1.5(LE*<0>) IC2_1.16(LE*<0>) IC2_1.18(VCCO_<1>) IC2_2.3(VCCO_<0>) IC2_2.5(LE*<0>) IC2_2.16(LE*<0>) IC2_2.18(VCCO_<1>) IC2_3.3(VCCO_<0>) IC2_3.5(LE*<0>) IC2_3.16(LE*<0>) IC2_3.18(VCCO_<1>) IC2_4.3(VCCO_<0>) IC2_4.5(LE*<0>) IC2_4.16(LE*<0>) IC2_4.18(VCCO_<1>) IC3.5(VBUS) IC4.5 IC5.5(VBUS) IC6.5 J4.G39(G<39>) J4.H40(H<40>)
P3V3: IC1.3 IC1.6(POR) IC1.9(CLR*) J4.C39(C<39>) J4.D32(D<32>) J4.D36(D<36>) J4.D38(D<38>) J4.D40(D<40>) T1.3(D) T2.3(D)
P5V: C1_1.2(B<0>) C1_2.2(B<0>) C1_3.2(B<0>) C1_4.2(B<0>) C4_1.2(B<0>) C4_2.2(B<0>) C4_3.2(B<0>) C4_4.2(B<0>) C7_1.2(B<0>) C7_2.2(B<0>) C7_3.2(B<0>) C7_4.2(B<0>) C10_1.2(B<0>) C10_2.2(B<0>) C10_3.2(B<0>) C10_4.2(B<0>) D1_1.2(C) D1_2.2(C) D1_3.2(C) D1_4.2(C) IC2.4(V+) IC2_1.7(VCC<0>) IC2_1.14(VCC<1>) IC2_2.7(VCC<0>) IC2_2.14(VCC<1>) IC2_3.7(VCC<0>) IC2_3.14(VCC<1>) IC2_4.7(VCC<0>) IC2_4.14(VCC<1>)
P12V: J4.C35(C<35>) J4.C37(C<37>)
BEAM_TRIGGER*<0>: IC2_4.19(Q*<0>) R11_4.2(B<0>) TP3_4.1(A<0>)
BEAM_TRIGGER*<1>: IC2_3.19(Q*<0>) R11_3.2(B<0>) TP3_3.1(A<0>)
BEAM_TRIGGER*<2>: IC2_2.19(Q*<0>) R11_2.2(B<0>) TP3_2.1(A<0>)
BEAM_TRIGGER*<3>: IC2_1.19(Q*<0>) R11_1.2(B<0>) TP3_1.1(A<0>)
BEAM_TRIGGER<0>: IC2_4.20(Q<0>) R13_4.2(B<0>) TP2_4.1(A<0>)
BEAM_TRIGGER<1>: IC2_3.20(Q<0>) R13_3.2(B<0>) TP2_3.1(A<0>)
BEAM_TRIGGER<2>: IC2_2.20(Q<0>) R13_2.2(B<0>) TP2_2.1(A<0>)
BEAM_TRIGGER<3>: IC2_1.20(Q<0>) R13_1.2(B<0>) TP2_1.1(A<0>)
BEAM_TRIGGER_CFD*<0>: IC3_4.15(A2)
BEAM_TRIGGER_CFD*<1>: IC3_3.15(A2)
BEAM_TRIGGER_CFD*<2>: IC3_2.15(A2)
BEAM_TRIGGER_CFD*<3>: IC3_1.15(A2)
BEAM_TRIGGER_CFD<0>: IC3_4.2(A1)
BEAM_TRIGGER_CFD<1>: IC3_3.2(A1)
BEAM_TRIGGER_CFD<2>: IC3_2.2(A1)
BEAM_TRIGGER_CFD<3>: IC3_1.2(A1)
BUSY0: J3.6(A<5>)
BUSY0*: J3.3(A<2>)
BUSY1: J1.7(A<6>)
BUSY1*: J1.9(A<8>)
BUSY2: J2.7(A<6>)
BUSY2*: J2.9(A<8>)
CLK1: J1.3(A<2>)
CLK1*: J1.1(A<0>)
CLK2: J2.3(A<2>)
CLK2*: J2.1(A<0>)
CONT0: J3.5(A<4>)
CONT0*: J3.4(A<3>)
CONT1: J1.4(A<3>)
CONT1*: J1.6(A<5>)
CONT2: J2.4(A<3>)
CONT2*: J2.6(A<5>)
DP0_C2M: J4.C2(C<2>)
DP0_C2M*: J4.C3(C<3>)
DP0_M2C: J4.C6(C<6>)
DP0_M2C*: J4.C7(C<7>)
DUT_CLK0: J3.2(A<1>)
DUT_CLK0*: J3.1(A<0>)
FMC_CLK1_M2C: J4.G2(G<2>)
FMC_CLK1_M2C*: J4.G3(G<3>)
FMC_LA*<0>: J4.G7(G<7>)
FMC_LA*<1>: J4.D9(D<9>)
FMC_LA*<2>: J4.H8(H<8>)
FMC_LA*<3>: J4.G10(G<10>)
FMC_LA*<4>: J4.H11(H<11>)
FMC_LA*<5>: J4.D12(D<12>)
FMC_LA*<6>: J4.C11(C<11>)
FMC_LA*<7>: J4.H14(H<14>)
FMC_LA*<8>: J4.G13(G<13>)
FMC_LA*<9>: J4.D15(D<15>)
FMC_LA*<10>: J4.C15(C<15>)
FMC_LA*<11>: J4.H17(H<17>)
FMC_LA*<12>: J4.G16(G<16>)
FMC_LA*<13>: J4.D18(D<18>)
FMC_LA*<14>: J4.C19(C<19>)
FMC_LA*<15>: J4.H20(H<20>)
FMC_LA*<16>: J4.G19(G<19>)
FMC_LA*<17>: J4.D21(D<21>)
FMC_LA*<18>: J4.C23(C<23>)
FMC_LA*<19>: J4.H23(H<23>)
FMC_LA*<20>: J4.G22(G<22>)
FMC_LA*<21>: J4.H26(H<26>)
FMC_LA*<22>: J4.G25(G<25>)
FMC_LA*<23>: J4.D24(D<24>)
FMC_LA*<24>: J4.H29(H<29>)
FMC_LA*<25>: J4.G28(G<28>)
FMC_LA*<26>: J4.D27(D<27>)
FMC_LA*<27>: J4.C27(C<27>)
FMC_LA*<28>: J4.H32(H<32>)
FMC_LA*<29>: J4.G31(G<31>)
FMC_LA*<30>: J4.H35(H<35>)
FMC_LA*<31>: J4.G34(G<34>)
FMC_LA*<32>: J4.H38(H<38>)
FMC_LA*<33>: J4.G37(G<37>)
FMC_LA<0>: J4.G6(G<6>)
FMC_LA<1>: J4.D8(D<8>)
FMC_LA<2>: J4.H7(H<7>)
FMC_LA<3>: J4.G9(G<9>)
FMC_LA<4>: J4.H10(H<10>)
FMC_LA<5>: J4.D11(D<11>)
FMC_LA<6>: J4.C10(C<10>)
FMC_LA<7>: J4.H13(H<13>)
FMC_LA<8>: J4.G12(G<12>)
FMC_LA<9>: J4.D14(D<14>)
FMC_LA<10>: J4.C14(C<14>)
FMC_LA<11>: J4.H16(H<16>)
FMC_LA<12>: J4.G15(G<15>)
FMC_LA<13>: J4.D17(D<17>)
FMC_LA<14>: J4.C18(C<18>)
FMC_LA<15>: J4.H19(H<19>)
FMC_LA<16>: J4.G18(G<18>)
FMC_LA<17>: J4.D20(D<20>)
FMC_LA<18>: J4.C22(C<22>)
FMC_LA<19>: J4.H22(H<22>)
FMC_LA<20>: J4.G21(G<21>)
FMC_LA<21>: J4.H25(H<25>)
FMC_LA<22>: J4.G24(G<24>)
FMC_LA<23>: J4.D23(D<23>)
FMC_LA<24>: J4.H28(H<28>)
FMC_LA<25>: J4.G27(G<27>)
FMC_LA<26>: J4.D26(D<26>)
FMC_LA<27>: J4.C26(C<26>)
FMC_LA<28>: J4.H31(H<31>)
FMC_LA<29>: J4.G30(G<30>)
FMC_LA<30>: J4.H34(H<34>)
FMC_LA<31>: J4.G33(G<33>)
FMC_LA<32>: J4.H37(H<37>)
FMC_LA<33>: J4.G36(G<36>)
FMC_PRSNT_M2C_L: J4.H2(H<2>)
FMC_PWR_GOOD_FLASH_RST_B: J4.D1(D<1>)
FMC_TCK_BUF: J4.D29(D<29>)
FMC_TDO: J4.D31(D<31>)
FMC_TMS_BUF: J4.D33(D<33>)
FPGA_TDO: J4.D30(D<30>)
FRAME: J3.9 J3.10
GA0: J4.C34(C<34>)
GA1: J4.D35(D<35>)
GBTCLK0_M2C: J4.D4(D<4>)
GBTCLK0_M2C*: J4.D5(D<5>)
HDMI_POWER_ENABLE1: IC4.2(A)
HDMI_POWER_ENABLE2: IC6.2(A)
IN<0>: PX5.1(A) R2_4.1(A<0>)
IN<1>: PX4.1(A) R2_3.1(A<0>)
IN<2>: PX3.1(A) R2_2.1(A<0>)
IN<3>: PX2.1(A) R2_1.1(A<0>)
M5V: C1_1.1(A<0>) C1_2.1(A<0>) C1_3.1(A<0>) C1_4.1(A<0>) C6_1.2(B<0>) C6_2.2(B<0>) C6_3.2(B<0>) C6_4.2(B<0>) C9_1.2(B<0>) C9_2.2(B<0>) C9_3.2(B<0>) C9_4.2(B<0>) D1_1.1(A) D1_2.1(A) D1_3.1(A) D1_4.1(A) IC2.11(V-) IC2_1.6(VEE<0>) IC2_1.15(VEE<1>) IC2_2.6(VEE<0>) IC2_2.15(VEE<1>) IC2_3.6(VEE<0>) IC2_3.15(VEE<1>) IC2_4.6(VEE<0>) IC2_4.15(VEE<1>)
SCL: IC1.14(SCL) J4.C30(C<30>)
SDA: IC1.13(SDA) J4.C31(C<31>)
SPARE1: J1.10(A<9>)
SPARE1*: J1.12(A<11>)
SPARE2: J2.10(A<9>)
SPARE2*: J2.12(A<11>)
TRIG0: J3.8(A<7>)
TRIG0*: J3.7(A<6>)
TRIG1: IC3.1(I/O11) IC3.3(I/O12) J1.15(A<14>)
TRIG1*: IC3.4(I/O22) IC3.6(I/O21) J1.16(A<15>)
TRIG2: IC5.1(I/O11) IC5.3(I/O12) J2.15(A<14>)
TRIG2*: IC5.4(I/O22) IC5.6(I/O21) J2.16(A<15>)
TRST_L: J4.D34(D<34>)
UNNAMED_1_AD5665R_I63_VOUTA: IC1.4(VOUTA) IC2.3(PIN<0>)
UNNAMED_1_AD5665R_I63_VOUTB: IC1.11(VOUTB) IC2.12(PIN<0>)
UNNAMED_1_AD5665R_I63_VOUTC: IC1.5(VOUTC) IC2.5(PIN<0>)
UNNAMED_1_AD5665R_I63_VOUTD: IC1.10(VOUTD) IC2.10(PIN<0>)
UNNAMED_1_CAPCERSMDCL2_I78_B_1: C2_1.2(B<0>) IC2_1.11(IN+<0>) R5_1.2(B<0>) TP1_1.1(A<0>)
UNNAMED_1_CAPCERSMDCL2_I78_B_2: C2_2.2(B<0>) IC2_2.11(IN+<0>) R5_2.2(B<0>) TP1_2.1(A<0>)
UNNAMED_1_CAPCERSMDCL2_I78_B_3: C2_3.2(B<0>) IC2_3.11(IN+<0>) R5_3.2(B<0>) TP1_3.1(A<0>)
UNNAMED_1_CAPCERSMDCL2_I78_B_4: C2_4.2(B<0>) IC2_4.11(IN+<0>) R5_4.2(B<0>) TP1_4.1(A<0>)
UNNAMED_1_DELAYLINEGL2L_I14_1_1: IC1_1.15(A2) R1_1.2(B<0>)
UNNAMED_1_DELAYLINEGL2L_I14_1_2: IC1_2.15(A2) R1_2.2(B<0>)
UNNAMED_1_DELAYLINEGL2L_I14_1_3: IC1_3.15(A2) R1_3.2(B<0>)
UNNAMED_1_DELAYLINEGL2L_I14_1_4: IC1_4.15(A2) R1_4.2(B<0>)
UNNAMED_1_DELAYLINEGL2L_I14_2_1: IC1_1.10(B2) R4_1.2(B<0>)
UNNAMED_1_DELAYLINEGL2L_I14_2_2: IC1_2.10(B2) R4_2.2(B<0>)
UNNAMED_1_DELAYLINEGL2L_I14_2_3: IC1_3.10(B2) R4_3.2(B<0>)
UNNAMED_1_DELAYLINEGL2L_I14_2_4: IC1_4.10(B2) R4_4.2(B<0>)
UNNAMED_1_DELAYLINEGL2L_I140__1: D1_1.3(AC) IC1_1.2(A1) IC2_1.12(IN-<0>) R2_1.2(B<0>) R3_1.1(A<0>)
UNNAMED_1_DELAYLINEGL2L_I140__2: D1_2.3(AC) IC1_2.2(A1) IC2_2.12(IN-<0>) R2_2.2(B<0>) R3_2.1(A<0>)
UNNAMED_1_DELAYLINEGL2L_I140__3: D1_3.3(AC) IC1_3.2(A1) IC2_3.12(IN-<0>) R2_3.2(B<0>) R3_3.1(A<0>)
UNNAMED_1_DELAYLINEGL2L_I140__4: D1_4.3(AC) IC1_4.2(A1) IC2_4.12(IN-<0>) R2_4.2(B<0>) R3_4.1(A<0>)
UNNAMED_1_MAX9601_I1_HYS_1: IC2_1.8(HYS<0>) R10_1.2(B<0>)
UNNAMED_1_MAX9601_I1_HYS_2: IC2_2.8(HYS<0>) R10_2.2(B<0>)
UNNAMED_1_MAX9601_I1_HYS_3: IC2_3.8(HYS<0>) R10_3.2(B<0>)
UNNAMED_1_MAX9601_I1_HYS_4: IC2_4.8(HYS<0>) R10_4.2(B<0>)
UNNAMED_1_MAX9601_I1_IN_1: IC2_1.10(IN+<0>) R3_1.2(B<0>) R7_1.2(B<0>)
UNNAMED_1_MAX9601_I1_IN_1_1: IC1_1.7(B1) IC2_1.9(IN-<0>) R6_1.2(B<0>) R8_1.2(B<0>)
UNNAMED_1_MAX9601_I1_IN_1_2: IC1_2.7(B1) IC2_2.9(IN-<0>) R6_2.2(B<0>) R8_2.2(B<0>)
UNNAMED_1_MAX9601_I1_IN_1_3: IC1_3.7(B1) IC2_3.9(IN-<0>) R6_3.2(B<0>) R8_3.2(B<0>)
UNNAMED_1_MAX9601_I1_IN_1_4: IC1_4.7(B1) IC2_4.9(IN-<0>) R6_4.2(B<0>) R8_4.2(B<0>)
UNNAMED_1_MAX9601_I1_IN_2: IC2_2.10(IN+<0>) R3_2.2(B<0>) R7_2.2(B<0>)
UNNAMED_1_MAX9601_I1_IN_3: IC2_3.10(IN+<0>) R3_3.2(B<0>) R7_3.2(B<0>)
UNNAMED_1_MAX9601_I1_IN_4: IC2_4.10(IN+<0>) R3_4.2(B<0>) R7_4.2(B<0>)
UNNAMED_1_MAX9601_I1_Q_1: IC2_1.2(Q*<0>) IC3_1.10(B2) R12_1.2(B<0>) TP6_1.1(A<0>)
UNNAMED_1_MAX9601_I1_Q_1_1: IC2_1.1(Q<0>) IC3_1.7(B1) R14_1.2(B<0>) TP5_1.1(A<0>)
UNNAMED_1_MAX9601_I1_Q_1_2: IC2_2.1(Q<0>) IC3_2.7(B1) R14_2.2(B<0>) TP5_2.1(A<0>)
UNNAMED_1_MAX9601_I1_Q_1_3: IC2_3.1(Q<0>) IC3_3.7(B1) R14_3.2(B<0>) TP5_3.1(A<0>)
UNNAMED_1_MAX9601_I1_Q_1_4: IC2_4.1(Q<0>) IC3_4.7(B1) R14_4.2(B<0>) TP5_4.1(A<0>)
UNNAMED_1_MAX9601_I1_Q_2: IC2_2.2(Q*<0>) IC3_2.10(B2) R12_2.2(B<0>) TP6_2.1(A<0>)
UNNAMED_1_MAX9601_I1_Q_3: IC2_3.2(Q*<0>) IC3_3.10(B2) R12_3.2(B<0>) TP6_3.1(A<0>)
UNNAMED_1_MAX9601_I1_Q_4: IC2_4.2(Q*<0>) IC3_4.10(B2) R12_4.2(B<0>) TP6_4.1(A<0>)
UNNAMED_1_MAX9601_I71_HYS_1: IC2_1.13(HYS<0>) R9_1.2(B<0>)
UNNAMED_1_MAX9601_I71_HYS_2: IC2_2.13(HYS<0>) R9_2.2(B<0>)
UNNAMED_1_MAX9601_I71_HYS_3: IC2_3.13(HYS<0>) R9_3.2(B<0>)
UNNAMED_1_MAX9601_I71_HYS_4: IC2_4.13(HYS<0>) R9_4.2(B<0>)
UNNAMED_1_OPA4277_I22_MIN: IC2.2(MIN<0>)
UNNAMED_1_OPA4277_I22_MIN_1: IC2.9(MIN<0>)
UNNAMED_1_OPA4277_I22_MIN_2: IC2.6(MIN<0>)
UNNAMED_1_OPA4277_I22_MIN_3: IC2.13(MIN<0>)
UNNAMED_1_PC036AFMCLPCCONNECT_1: J4.H5(H<5>) PX1.2(B)
UNNAMED_1_PC036AFMCLPCCONNECTOR: J4.H4(H<4>) PX1.1(A)
UNNAMED_4_74LVC1G07_I28_Y: IC4.4(Y) T1.1(G)
UNNAMED_4_74LVC1G07_I40_Y: IC6.4(Y) T2.1(G)
UNNAMED_4_CON19P_I2_A: J1.14(A<13>) T1.2(S)
UNNAMED_4_CON19P_I3_A: J2.14(A<13>) T2.2(S)
VREF: IC1.7(VREFIN/VREFOUT)
VREF_A_M2C: J4.H1(H<1>)
VTHRESH<0>: IC2.1(OUT<0>) R5_4.1(A<0>)
VTHRESH<1>: IC2.14(OUT<0>) R5_3.1(A<0>)
VTHRESH<2>: IC2.7(OUT<0>) R5_2.1(A<0>)
VTHRESH<3>: IC2.8(OUT<0>) R5_1.1(A<0>)

Pads without a net: IC4 1; IC6 1; J1 13 18 19; J2 13 18 19

## Via types
v1: diameter 0.914, hole 0.406, TOP to BOTTOM, 204 vias
v2: diameter 0.61, hole 0.33, TOP to BOTTOM, 8 vias

## Routing (per net, layer and track width the routed paths; a pad name or vN(x,y) marks a point on that pad's centre or on a via; arc(x,y) is an arc through that point)
GND_SIGNAL: length 314.9
  TOP w0.4: IC3_4.1 131.75,23.95 131.8,24 v1(132.01,24) ; v1(110.3,46.71) 110.3,46.7 110.31,46.7 IC1_3.6 ; v1(130.03,43.8) 129.95,43.8 129.65,43.5 R7_4.1 ; R10_2.1 96.75,36.06 96.8,36.01 v1(96.8,35.1) ; C8_4.1 v1(118.36,37.8) ; v1(74.85,46.71) 74.85,46.6 74.84,46.59 IC1_1.8 ; IC3_4.8 v1(129.19,32.84) ; IC1_4.6 129.31,46.7 129.3,46.7 v1(129.3,46.71) ; 85,30.3 v1(86.41,30.3) ; IC3_4.14 v1(121.59,26.49) ; v1(74.85,54.31) 74.85,54.2 74.84,54.2 IC1_1.9 ; C5_1.1 v1(76.15,36.1) ; R1_3.1 106.5,54.45 IC1_3.14 106.5,51.59 106.4,51.5 v1(106.4,51.49) ; IC1_2.9 93.84,54.2 93.85,54.2 v1(93.85,54.31) ; R11_4.1 v1(117.75,36.2) ; v1(109.2,54.31) 109.2,54.3 109.03,54.13 IC1_3.12 ; v1(70.3,37.9) 70.43,37.9 70.68,38.15 IC2_1.4 ; C6_4.1 v1(118.67,39.5) ; R4_4.1 129.31,54.45 IC1_4.11 129.3,52.9 v1(129.3,51.49) ; v1(83.59,24) 83.8,24 83.84,23.95 IC3_2.16 ; v1(87.4,51.49) 87.4,51.5 87.5,51.59 IC1_2.14 87.5,54.45 R1_2.1 ; R7_1.1 72.65,43.5 72.95,43.8 v1(73.03,43.8) ; R9_3.1 v1(99.36,41) ; IC3_4.16 121.84,23.95 121.8,24 v1(121.59,24) ; IC1_2.16 v1(84.95,51.49) ; v1(131.85,54.31) 131.85,54.2 131.84,54.2 IC1_4.9 ; IC3_4.9 124.11,32.84 124.15,32.8 v1(124.41,32.8) ; IC1_4.5 128.03,46.59 128.05,46.6 v1(128.05,46.71) ; C6_1.1 v1(61.66,39.5) ; R14_4.1 132.01,29.86 v1(132.01,29.1) 131.75,29.1 131.69,29.03 IC3_4.5 ; IC1_3.4 v1(107.77,46.71) ; v2(105.39,29.03) IC3_3.12 v1(102.48,29.03) 102.48,29.91 R12_3.1 ; R9_1.1 v1(61.37,41) ; R11_2.1 v1(79.75,36.2) ; R6_3.1 v1(115.65,41.4) ; IC3_2.9 86.11,32.84 86.15,32.8 v1(86.41,32.8) ; v1(75.01,24) 74.8,24 74.75,23.95 IC3_1.1 ; C3_4.1 v1(134.95,27.66) ; C3_3.1 v1(115.95,27.66) ; R8_1.1 v1(77.5,39.5) ; IC3_3.8 v1(110.19,32.84) ; IC3_3.5 112.69,29.03 112.75,29.1 v1(113.01,29.1) 113.01,29.86 R14_3.1 ; IC3_1.16 64.84,23.95 64.8,24 v1(64.59,24) ; v1(67.41,32.8) 67.15,32.8 67.11,32.84 IC3_1.9 ; R8_3.1 v1(115.5,39.5) ; R1_4.1 125.5,54.45 IC1_4.14 125.5,51.59 125.4,51.5 v1(125.4,51.49) ; IC3_2.1 93.75,23.95 93.8,24 v1(94.01,24) ; R7_2.1 91.65,43.5 91.95,43.8 v1(92.03,43.8) ; IC1_1.4 v1(69.77,46.71) ; IC3_1.5 74.69,29.03 74.75,29.1 v1(75.01,29.1) 75.01,29.86 R14_1.1 ; 62.5,34.6 v1(62.5,33.4) ; R8_4.1 v1(134.5,39.5) ; C8_1.1 v1(61.37,37.8) ; IC1_4.12 128.03,54.13 128.2,54.3 v1(128.2,54.31) ; IC3_1.14 v1(64.59,26.49) ; IC1_4.3 125.5,46.59 125.5,46.6 v1(125.5,46.71) ; R1_1.1 68.5,54.45 IC1_1.14 68.5,51.59 68.4,51.5 v1(68.4,51.49) ; v1(90.2,54.31) 90.2,54.3 90.03,54.13 IC1_2.12 ; IC3_1.4 v1(72.19,27.77) ; 92.6,30.3 v1(91.19,30.3) ; IC1_4.16 v1(122.95,51.49) ; R12_1.1 64.48,29.91 v1(64.48,29.03) IC3_1.12 v2(67.39,29.03) ; IC3_3.9 105.11,32.84 105.15,32.8 v1(105.41,32.8) ; IC1_2.6 91.31,46.7 91.3,46.7 v1(91.3,46.71) ; v1(110.3,51.49) 110.3,52.9 IC1_3.11 110.31,54.45 R4_3.1 ; v1(134.8,35.1) 134.8,36.01 134.75,36.06 R10_4.1 ; v1(72.3,51.49) 72.3,52.9 IC1_1.11 72.31,54.45 R4_1.1 ; IC1_3.9 112.84,54.2 112.85,54.2 v1(112.85,54.31) ; IC1_1.16 v1(65.95,51.49) ; R6_4.1 v1(134.65,41.4) ; C4_4.1 v1(131.8,33.8) ; IC3_2.5 93.69,29.03 93.75,29.1 v1(94.01,29.1) 94.01,29.86 R14_2.1 ; v1(131.85,46.71) 131.85,46.6 131.84,46.59 IC1_4.8 ; IC3_2.4 v1(91.19,27.77) ; IC1_1.1 v1(65.95,46.71) ; v1(109.05,46.71) 109.05,46.6 109.03,46.59 IC1_3.5 ; R9_2.1 v1(80.36,41) ; C8_3.1 v1(99.36,37.8) ; C6_3.1 v1(99.67,39.5) ; IC1_1.3 68.5,46.59 68.5,46.6 v1(68.5,46.71) ; v1(90.05,46.71) 90.05,46.6 90.03,46.59 IC1_2.5 ; v1(111.03,43.8) 110.95,43.8 110.65,43.5 R7_3.1 ; R11_1.1 v1(60.75,36.2) ; IC1_1.5 71.03,46.59 71.05,46.6 v1(71.05,46.71) ; IC3_2.8 v1(91.19,32.84) ; IC1_3.16 v1(103.95,51.49) ; IC2_3.4 108.68,38.15 108.43,37.9 v1(108.3,37.9) ; 104,30.3 v1(105.41,30.3) ; IC1_2.13 88.77,54.09 88.55,54.3 v1(88.55,54.31) ; R12_2.1 83.48,29.91 v1(83.48,29.03) IC3_2.12 v2(86.39,29.03) ; C4_3.1 v1(112.8,33.8) ; C4_1.1 v1(74.8,33.8) ; IC2_2.17 v1(86.45,38.15) ; v1(107.55,54.31) 107.55,54.3 107.77,54.09 IC1_3.13 ; 100.5,34.6 v1(100.5,33.4) ; IC1_1.6 72.31,46.7 72.3,46.7 v1(72.3,46.71) ; IC3_3.14 v1(102.59,26.49) ; C6_2.1 v1(80.67,39.5) ; IC3_3.13 v1(105.41,27.77) ; IC2_4.4 127.68,38.15 127.43,37.9 v1(127.3,37.9) ; R10_3.1 115.75,36.06 115.8,36.01 v1(115.8,35.1) ; v2(124.39,29.03) IC3_4.12 v1(121.48,29.03) 121.48,29.91 R12_4.1 ; v1(113.01,24) 112.8,24 112.75,23.95 IC3_3.1 ; IC3_4.4 v1(129.19,27.77) ; IC1_1.12 71.03,54.13 71.2,54.3 v1(71.2,54.31) ; IC3_2.13 v1(86.41,27.77) ; IC1_4.13 126.77,54.09 126.55,54.3 v1(126.55,54.31) ; IC3_3.4 v1(110.19,27.77) ; IC3_1.8 v1(72.19,32.84) ; IC1_2.4 v1(88.77,46.71) ; C5_2.1 v1(95.15,36.1) ; v1(77.8,35.1) 77.8,36.01 77.75,36.06 R10_1.1 ; 123,30.3 v1(124.41,30.3) ; C3_1.1 v1(77.95,27.66) ; C2_1.1 v1(61.37,42.6) ; v1(106.5,46.71) 106.5,46.6 106.5,46.59 IC1_3.3 ; IC2_1.17 v1(67.45,38.15) ; IC3_1.13 v1(67.41,27.77) ; 130.6,30.3 v1(129.19,30.3) ; 73.6,30.3 v1(72.19,30.3) ; R9_4.1 v1(118.36,41) ; 111.6,30.3 v1(110.19,30.3) ; C5_4.1 v1(133.15,36.1) ; v1(87.5,46.71) 87.5,46.6 87.5,46.59 IC1_2.3 ; IC3_4.13 v1(124.41,27.77) ; v1(89.3,37.9) 89.43,37.9 89.68,38.15 IC2_2.4 ; C2_2.1 v1(80.36,42.6) ; IC3_3.3 v1(113.01,26.49) ; IC1_2.8 93.84,46.59 93.85,46.6 v1(93.85,46.71) ; C3_2.1 v1(96.95,27.66) ; v1(69.55,54.31) 69.55,54.3 69.77,54.09 IC1_1.13 ; R8_2.1 v1(96.5,39.5) ; C4_2.1 v1(93.8,33.8) ; R6_1.1 v1(77.65,41.4) ; v1(112.85,46.71) 112.85,46.6 112.84,46.59 IC1_3.8 ; C2_4.1 v1(118.36,42.6) ; IC1_3.1 v1(103.95,46.71) ; IC2_3.17 v1(105.45,38.15) ; R11_3.1 v1(98.75,36.2) ; C5_3.1 v1(114.15,36.1) ; R6_2.1 v1(96.65,41.4) ; v1(102.59,24) 102.8,24 102.84,23.95 IC3_3.16 ; C2_3.1 v1(99.36,42.6) ; C8_2.1 v1(80.36,37.8) ; IC3_4.3 v1(132.01,26.49) ; IC3_2.3 v1(94.01,26.49) ; IC1_4.4 v1(126.77,46.71) ; 81.5,34.6 v1(81.5,33.4) ; 66,30.3 v1(67.41,30.3) ; v1(91.3,51.49) 91.3,52.9 IC1_2.11 91.31,54.45 R4_2.1 ; IC3_1.3 v1(75.01,26.49) ; 119.5,34.6 v1(119.5,33.4) ; IC1_4.1 v1(122.95,46.71) ; IC2_4.17 v1(124.45,38.15) ; IC3_2.14 v1(83.59,26.49) ; IC1_2.1 v1(84.95,46.71)
  LAYER2 w0.17: TP7_3.1 108.63,29 ; TP7_3.1 106.87,29 ; TP7_3.1 107.75,28.12 ; TP7_3.1 107.75,29.88 ; 61,33.42 TP4_1.1 ; TP4_1.1 61,35.18 ; TP4_1.1 60.12,34.3 ; TP4_1.1 61.88,34.3 ; TP7_4.1 126.75,29.88 ; TP7_4.1 125.87,29 ; TP7_4.1 126.75,28.12 ; TP7_4.1 127.63,29 ; 117.12,34.3 TP4_4.1 ; TP4_4.1 118,35.18 ; TP4_4.1 118.88,34.3 ; TP4_4.1 118,33.42 ; TP4_2.1 80,35.18 ; TP4_2.1 79.12,34.3 ; TP4_2.1 80,33.42 ; TP4_2.1 80.88,34.3 ; TP7_1.1 69.75,29.88 ; TP7_1.1 69.75,28.12 ; TP7_1.1 70.63,29 ; TP7_1.1 68.87,29 ; 88.75,28.12 TP7_2.1 ; TP7_2.1 88.75,29.88 ; TP7_2.1 89.63,29 ; TP7_2.1 87.87,29 ; 99,33.42 TP4_3.1 ; TP4_3.1 99.88,34.3 ; TP4_3.1 99,35.18 ; TP4_3.1 98.12,34.3
  LAYER5 w0.17: TP4_2.1 80,35.18 ; TP4_2.1 79.12,34.3 ; TP4_2.1 80,33.42 ; TP4_2.1 80.88,34.3 ; 61,33.42 TP4_1.1 ; TP4_1.1 61,35.18 ; TP4_1.1 60.12,34.3 ; TP4_1.1 61.88,34.3 ; TP7_2.1 89.63,29 ; TP7_2.1 88.75,28.12 ; TP7_2.1 87.87,29 ; TP7_2.1 88.75,29.88 ; 68.87,29 TP7_1.1 ; TP7_1.1 69.75,29.88 ; TP7_1.1 69.75,28.12 ; TP7_1.1 70.63,29 ; 118,33.42 TP4_4.1 ; TP4_4.1 117.12,34.3 ; TP4_4.1 118,35.18 ; TP4_4.1 118.88,34.3 ; 98.12,34.3 TP4_3.1 ; TP4_3.1 99,33.42 ; TP4_3.1 99.88,34.3 ; TP4_3.1 99,35.18 ; 126.75,28.12 TP7_4.1 ; TP7_4.1 127.63,29 ; TP7_4.1 125.87,29 ; TP7_4.1 126.75,29.88 ; 106.87,29 TP7_3.1 ; TP7_3.1 107.75,29.88 ; TP7_3.1 107.75,28.12 ; TP7_3.1 108.63,29
  BOTTOM w0.4: v1(70.3,37.9) 70.3,37.85 70.9,37.25 C9_1.1 ; v1(122.6,43.2) 122.78,43.2 123.15,42.83 C10_4.1 ; C9_3.1 108.9,37.25 108.3,37.85 v1(108.3,37.9) ; v1(130.27,42.68) 129.64,42.05 C7_4.1 ; v1(103.6,43.2) 103.78,43.2 104.15,42.83 C10_3.1 ; v1(73.27,42.68) 72.64,42.05 C7_1.1 ; C7_3.1 110.64,42.05 v1(111.27,42.68) ; C9_2.1 89.9,37.25 89.3,37.85 v1(89.3,37.9) ; C7_2.1 91.64,42.05 v1(92.27,42.68) ; C9_4.1 127.9,37.25 127.3,37.85 v1(127.3,37.9) ; C10_1.1 66.15,42.83 65.78,43.2 v1(65.6,43.2) ; v1(84.6,43.2) 84.78,43.2 85.15,42.83 C10_2.1
P2V5: length 57
  TOP w0.2: 101.95,37.85 102.4,38.3 102.65,38.3 103.15,38.8 IC2_3.16 ; IC2_1.16 65.15,38.8 64.65,38.3 64.4,38.3 63.95,37.85 ; IC2_2.5 91.71,38.8 92.15,38.36 92.15,37.65 v1(92.4,37.4) ; IC2_4.16 122.15,38.8 121.65,38.3 121.4,38.3 120.95,37.85 ; v1(130.4,37.4) 130.15,37.65 130.15,38.36 129.71,38.8 IC2_4.5 ; v1(111.4,37.4) 111.15,37.65 111.15,38.36 110.71,38.8 IC2_3.5 ; IC2_2.16 84.15,38.8 83.65,38.3 83.4,38.3 82.95,37.85 ; v1(73.4,37.4) 73.15,37.65 73.15,38.36 72.71,38.8 IC2_1.5
  TOP w0.4: v1(77.95,31.34) C3_1.2 ; IC2_1.3 73.02,37.5 73.12,37.4 v1(73.4,37.4) C5_1.2 ; v1(124.6,36.9) 124.52,36.9 124.15,37.27 124.14,37.27 124,37.41 123.95,37.41 123.86,37.5 IC2_4.18 121.25,37.5 C8_4.2 120.95,37.85 ; 101.95,37.85 C8_3.2 102.25,37.5 IC2_3.18 104.86,37.5 104.95,37.41 105,37.41 105.14,37.27 105.15,37.27 105.52,36.9 v1(105.6,36.9) ; 82.95,37.85 C8_2.2 83.25,37.5 IC2_2.18 85.86,37.5 85.95,37.41 86,37.41 86.14,37.27 86.15,37.27 86.52,36.9 v1(86.6,36.9) ; v1(134.95,31.34) C3_4.2 ; v1(67.6,36.9) 67.52,36.9 67.15,37.27 67.14,37.27 67,37.41 66.95,37.41 66.86,37.5 IC2_1.18 64.25,37.5 C8_1.2 63.95,37.85 ; C5_3.2 v1(111.4,37.4) 111.12,37.4 111.02,37.5 IC2_3.3 ; v1(115.95,31.34) C3_3.2 ; IC2_4.3 130.02,37.5 130.12,37.4 v1(130.4,37.4) C5_4.2 ; IC2_2.3 92.02,37.5 92.12,37.4 v1(92.4,37.4) C5_2.2 ; v1(96.95,31.34) C3_2.2
  BOTTOM w0.4: 73.6,29.1 v2(72.2,29.1) ; 111.6,29.1 v2(110.2,29.1) ; 92.6,29.1 v2(91.2,29.1) ; 130.6,29.1 v2(129.2,29.1)
P5V: length 42.1
  TOP w0.4: v1(86.55,40.47) 86.34,40.26 86.24,40.26 86.08,40.1 IC2_2.14 ; IC2_4.14 124.08,40.1 124.24,40.26 124.34,40.26 v1(124.55,40.47) ; C4_3.2 v1(116.35,33.8) ; IC2_1.14 67.08,40.1 67.24,40.26 67.34,40.26 v1(67.55,40.47) ; D1_1.2 69.4,58.15 C1_1.2 70.8,57.95 v1(70.85,57.9) ; v1(89.85,57.9) 89.8,57.95 C1_2.2 88.4,58.15 D1_2.2 ; v1(108.4,40.38) 108.68,40.1 IC2_3.7 ; v1(70.4,40.38) 70.68,40.1 IC2_1.7 ; IC2_3.14 105.08,40.1 105.24,40.26 105.34,40.26 v1(105.55,40.47) ; v1(108.85,57.9) 108.8,57.95 C1_3.2 107.4,58.15 D1_3.2 ; IC2_2.7 89.68,40.1 v1(89.4,40.38) ; C4_4.2 v1(135.35,33.8) ; C4_1.2 v1(78.35,33.8) ; D1_4.2 126.4,58.15 C1_4.2 127.8,57.95 v1(127.85,57.9) ; C4_2.2 v1(97.35,33.8) ; v1(127.4,40.38) 127.68,40.1 IC2_4.7
  BOTTOM w0.4: v1(86.55,40.47) 85.23,40.47 C10_2.2 ; v1(124.55,40.47) 123.23,40.47 C10_4.2 ; v1(108.4,40.38) 108.63,40.38 109.05,40.8 109.55,40.8 C7_3.2 ; C10_1.2 66.23,40.47 v1(67.55,40.47) ; C7_2.2 90.55,40.8 90.05,40.8 89.63,40.38 v1(89.4,40.38) ; v1(127.4,40.38) 127.63,40.38 128.05,40.8 128.55,40.8 C7_4.2 ; C10_3.2 104.23,40.47 v1(105.55,40.47) ; v1(70.4,40.38) 70.63,40.38 71.05,40.8 71.55,40.8 C7_1.2
BEAM_TRIGGER*<0>: length 9.3
  TOP w0.2: R11_4.2 120.25,35.03 120.27,35.01 120.27,33.81 120.33,33.75 120.33,33.05
  TOP w0.4: 118.7,30.55 TP3_4.1 118.7,31.3 120.33,32.94 120.33,33.05 ; IC2_4.19 121.7,36.85 121.05,36.2 R11_4.2
BEAM_TRIGGER*<1>: length 9.3
  TOP w0.2: 101.33,33.05 101.33,33.75 101.27,33.81 101.27,35.01 101.25,35.03 R11_3.2
  TOP w0.4: IC2_3.19 102.7,36.85 102.05,36.2 R11_3.2 ; 99.7,30.55 TP3_3.1 99.7,31.3 101.33,32.94 101.33,33.05
BEAM_TRIGGER*<2>: length 9.3
  TOP w0.2: R11_2.2 82.25,35.03 82.27,35.01 82.27,33.81 82.33,33.75 82.33,33.05
  TOP w0.4: 80.7,30.55 TP3_2.1 80.7,31.3 82.33,32.94 82.33,33.05 ; IC2_2.19 83.7,36.85 83.05,36.2 R11_2.2
BEAM_TRIGGER*<3>: length 9.3
  TOP w0.2: R11_1.2 63.25,35.03 63.27,35.01 63.27,33.81 63.34,33.75 63.34,33.05
  TOP w0.4: IC2_1.19 64.7,36.85 64.05,36.2 R11_1.2 ; 61.7,30.55 TP3_1.1 61.7,31.3 63.34,32.94 63.34,33.05
BEAM_TRIGGER<0>: length 7.7
  TOP w0.2: IC2_4.20 122.5,35.74 TP2_4.1 122.4,34.4 R13_4.2 121.05,32.8 120.15,31.9
  TOP w0.4: 120.15,31.9 120.15,30.5
BEAM_TRIGGER<1>: length 7.7
  TOP w0.2: 101.15,31.9 102.05,32.8 R13_3.2 103.4,34.4 TP2_3.1 103.5,35.74 IC2_3.20
  TOP w0.4: 101.15,31.9 101.15,30.5
BEAM_TRIGGER<2>: length 7.7
  TOP w0.2: 82.15,31.9 83.05,32.8 R13_2.2 84.4,34.4 TP2_2.1 84.5,35.74 IC2_2.20
  TOP w0.4: 82.15,31.9 82.15,30.5
BEAM_TRIGGER<3>: length 7.7
  TOP w0.2: IC2_1.20 65.5,35.74 TP2_1.1 65.4,34.4 R13_1.2 64.05,32.8 63.15,31.9
  TOP w0.4: 63.15,31.9 63.15,30.5
BEAM_TRIGGER_CFD*<0>: length 6.6
  TOP w0.4: 126.15,21.45 126.15,24.6 125.53,25.23 IC3_4.15
BEAM_TRIGGER_CFD*<1>: length 6.6
  TOP w0.4: 107.15,21.45 107.15,24.6 106.53,25.23 IC3_3.15
BEAM_TRIGGER_CFD*<2>: length 6.6
  TOP w0.4: IC3_2.15 87.53,25.23 88.15,24.6 88.15,21.45
BEAM_TRIGGER_CFD*<3>: length 6.6
  TOP w0.4: 69.15,21.45 69.15,24.6 68.53,25.23 IC3_1.15
BEAM_TRIGGER_CFD<0>: length 7
  TOP w0.4: 126.95,21.5 126.95,24.6 127.58,25.23 IC3_4.2
BEAM_TRIGGER_CFD<1>: length 7
  TOP w0.4: IC3_3.2 108.58,25.23 107.95,24.6 107.95,21.5
BEAM_TRIGGER_CFD<2>: length 7
  TOP w0.4: 88.95,21.5 88.95,24.6 89.58,25.23 IC3_2.2
BEAM_TRIGGER_CFD<3>: length 7
  TOP w0.4: 69.95,21.5 69.95,24.6 70.58,25.23 IC3_1.2
BUSY1: length 5.5
  TOP w0.17: 13.8,64.4 13.65,64.4 12.85,65.2 12.85,67 13.55,67.7 J1.7
BUSY1*: length 5
  TOP w0.17: J1.9 14.35,67.93 13.2,66.79 13.2,65.4 13.75,64.85
BUSY2: length 5.5
  TOP w0.17: J2.7 30.55,67.7 29.85,67 29.85,65.2 30.65,64.4 30.8,64.4
BUSY2*: length 5
  TOP w0.17: J2.9 31.35,67.93 30.2,66.79 30.2,65.4 30.75,64.85
CLK1: length 3.5
  TOP w0.17: J1.3 11.95,67.85 11.35,67.25 11.35,66.25 11.1,66
CLK1*: length 2.6
  TOP w0.17: J1.1 11.15,67.75 11,67.6 11,66.65
CLK2: length 3.5
  TOP w0.17: 28.1,66 28.35,66.25 28.35,67.25 28.95,67.85 J2.3
CLK2*: length 2.6
  TOP w0.17: 28,66.65 28,67.6 28.15,67.75 J2.1
CONT1: length 5
  TOP w0.17: 11.05,64.85 11.35,64.85 12,65.5 12,67.4 12.35,67.75 J1.4
CONT1*: length 6
  TOP w0.17: 11,64.4 11.5,64.4 12.35,65.25 12.35,67.14 13.15,67.93 J1.6
CONT2: length 5
  TOP w0.17: 28.05,64.85 28.35,64.85 29,65.5 29,67.4 29.35,67.75 J2.4
CONT2*: length 5.5
  TOP w0.17: J2.6 30.15,67.93 29.35,67.14 29.35,65.25 28.5,64.4
M5V: length 42.2
  TOP w0.4: D1_1.1 69.12,56.25 69.4,56.33 69.52,56.45 C1_1.1 v1(70.8,56.45) ; v1(89.4,39.17) 89.68,39.45 IC2_2.6 ; C6_3.2 102,39.45 IC2_3.15 105.23,39.45 105.38,39.3 v1(106.1,39.3) ; D1_4.1 126.12,56.25 126.4,56.33 126.52,56.45 C1_4.1 v1(127.8,56.45) ; v1(108.8,56.45) C1_3.1 107.52,56.45 107.4,56.33 107.12,56.25 D1_3.1 ; v1(87.1,39.3) 86.38,39.3 86.23,39.45 IC2_2.15 83,39.45 C6_2.2 ; v1(68.1,39.3) 67.38,39.3 67.23,39.45 IC2_1.15 64,39.45 C6_1.2 ; v1(125.1,39.3) 124.38,39.3 124.23,39.45 IC2_4.15 121,39.45 C6_4.2 ; v1(70.4,39.17) 70.68,39.45 IC2_1.6 ; v1(108.4,39.17) 108.68,39.45 IC2_3.6 ; D1_2.1 88.12,56.25 88.4,56.33 88.52,56.45 C1_2.1 v1(89.8,56.45) ; v1(127.4,39.17) 127.68,39.45 IC2_4.6
  BOTTOM w0.4: C9_3.2 109.75,38.7 108.9,38.7 108.43,39.17 v1(108.4,39.17) ; v1(127.4,39.17) 127.43,39.17 127.9,38.7 128.75,38.7 C9_4.2 ; C9_1.2 71.75,38.7 70.9,38.7 70.43,39.17 v1(70.4,39.17) ; v1(89.4,39.17) 89.43,39.17 89.9,38.7 90.75,38.7 C9_2.2
SPARE1: length 3.6
  TOP w0.17: 13.7,66.05 13.7,66.65 14.75,67.7 J1.10
SPARE1*: length 2.8
  TOP w0.17: 14.65,66.75 14.65,66.85 15.55,67.75 J1.12
SPARE2: length 3.6
  TOP w0.17: J2.10 31.75,67.7 30.7,66.65 30.7,66.05
SPARE2*: length 2.7
  TOP w0.17: J2.12 32.55,67.75 31.65,66.85
UNNAMED_1_CAPCERSMDCL2_I78_B_1: length 9.8
  TOP w0.2: IC2_1.11 65.26,42.05 64.71,42.6 C2_1.2 63.95,43.33 62.83,44.45 62.15,44.45
  TOP w0.25: R5_1.2 62.15,44.45 63.15,45.45 63.15,46.75 TP1_1.1
UNNAMED_1_CAPCERSMDCL2_I78_B_2: length 9.8
  TOP w0.2: 81.15,44.45 81.83,44.45 82.95,43.33 C2_2.2 83.71,42.6 84.26,42.05 IC2_2.11
  TOP w0.25: R5_2.2 81.15,44.45 82.15,45.45 82.15,46.75 TP1_2.1
UNNAMED_1_CAPCERSMDCL2_I78_B_3: length 9.8
  TOP w0.2: IC2_3.11 103.26,42.05 102.71,42.6 C2_3.2 101.95,43.33 100.83,44.45 100.15,44.45
  TOP w0.25: TP1_3.1 101.15,46.75 101.15,45.45 100.15,44.45 R5_3.2
UNNAMED_1_CAPCERSMDCL2_I78_B_4: length 9.8
  TOP w0.2: 119.15,44.45 119.83,44.45 120.95,43.33 C2_4.2 121.71,42.6 122.26,42.05 IC2_4.11
  TOP w0.25: R5_4.2 119.15,44.45 120.15,45.45 120.15,46.75 TP1_4.1
UNNAMED_1_DELAYLINEGL2L_I14_1_1: length 1.9
  TOP w0.4: 67.22,52.9 67.22,54.58 R1_1.2
UNNAMED_1_DELAYLINEGL2L_I14_1_2: length 1.9
  TOP w0.4: 86.22,52.9 86.22,54.58 R1_2.2
UNNAMED_1_DELAYLINEGL2L_I14_1_3: length 1.9
  TOP w0.4: R1_3.2 105.22,54.58 105.22,52.9
UNNAMED_1_DELAYLINEGL2L_I14_1_4: length 1.9
  TOP w0.4: 124.22,52.9 124.22,54.58 R1_4.2
UNNAMED_1_DELAYLINEGL2L_I14_2_1: length 1.9
  TOP w0.4: R4_1.2 73.55,54.17 73.58,54.15 IC1_1.10
UNNAMED_1_DELAYLINEGL2L_I14_2_2: length 1.9
  TOP w0.4: R4_2.2 92.55,54.17 92.58,54.15 IC1_2.10
UNNAMED_1_DELAYLINEGL2L_I14_2_3: length 1.9
  TOP w0.4: R4_3.2 111.55,54.17 111.58,54.15 IC1_3.10
UNNAMED_1_DELAYLINEGL2L_I14_2_4: length 1.9
  TOP w0.4: R4_4.2 130.55,54.17 130.57,54.15 IC1_4.10
UNNAMED_1_DELAYLINEGL2L_I140__1: length 21.4
  TOP w0.2: 67.22,43.48 67.22,41.56 67.06,41.4 IC2_1.12 ; 67.22,43.48 R3_1.1 ; 67.22,43.48 67.22,45.3
  TOP w0.4: 67.22,45.3 67.22,47.08 64.6,49.7 64.6,53.6 65.65,54.65 D1_1.3 65.65,59.42 65.7,59.47 R2_1.2
UNNAMED_1_DELAYLINEGL2L_I140__2: length 21.4
  TOP w0.2: 86.22,43.48 86.22,45.3 ; 86.22,43.48 R3_2.1 ; 86.22,43.48 86.22,41.56 86.06,41.4 IC2_2.12
  TOP w0.4: 86.22,45.3 86.22,47.08 83.6,49.7 83.6,53.6 84.65,54.65 D1_2.3 84.65,59.42 84.7,59.47 R2_2.2
UNNAMED_1_DELAYLINEGL2L_I140__3: length 21.4
  TOP w0.2: 105.22,43.48 105.22,45.3 ; 105.22,43.48 105.22,41.56 105.06,41.4 IC2_3.12 ; 105.22,43.48 R3_3.1
  TOP w0.4: R2_3.2 103.7,59.47 103.65,59.42 D1_3.3 103.65,54.65 102.6,53.6 102.6,49.7 105.22,47.08 105.22,45.3
UNNAMED_1_DELAYLINEGL2L_I140__4: length 21.4
  TOP w0.2: 124.22,43.48 124.22,45.3 ; 124.22,43.48 R3_4.1 ; 124.22,43.48 124.22,41.56 124.06,41.4 IC2_4.12
  TOP w0.4: R2_4.2 122.7,59.47 122.65,59.42 D1_4.3 122.65,54.65 121.6,53.6 121.6,49.7 124.22,47.08 124.22,45.3
UNNAMED_1_MAX9601_I1_HYS_1: length 8.1
  TOP w0.2: IC2_1.8 73,40.75 73.4,40.35 73.4,38.64 73.68,38.36 77.09,38.36 77.7,37.75 R10_1.2
UNNAMED_1_MAX9601_I1_HYS_2: length 8.1
  TOP w0.2: IC2_2.8 92,40.75 92.4,40.35 92.4,38.64 92.68,38.36 96.09,38.36 96.7,37.75 R10_2.2
UNNAMED_1_MAX9601_I1_HYS_3: length 8.1
  TOP w0.2: IC2_3.8 111,40.75 111.4,40.35 111.4,38.64 111.68,38.36 115.09,38.36 115.7,37.75 R10_3.2
UNNAMED_1_MAX9601_I1_HYS_4: length 8.1
  TOP w0.2: R10_4.2 134.7,37.75 134.09,38.36 130.68,38.36 130.4,38.64 130.4,40.35 130,40.75 IC2_4.8
UNNAMED_1_MAX9601_I1_IN_1: length 3.8
  TOP w0.2: R3_1.2 R7_1.2 70.45,43.45 71.06,42.84 71.11,42.84 IC2_1.10
UNNAMED_1_MAX9601_I1_IN_1_1: length 8.8
  TOP w0.2: IC2_1.9 74.4,41.4 74.5,41.5 R6_1.2 R8_1.2
  TOP w0.4: 74.5,41.5 74.5,43.88 73.58,44.8 IC1_1.7
UNNAMED_1_MAX9601_I1_IN_1_2: length 8.8
  TOP w0.2: IC2_2.9 93.4,41.4 93.5,41.5 R6_2.2 R8_2.2
  TOP w0.4: IC1_2.7 92.58,44.8 93.5,43.88 93.5,41.5
UNNAMED_1_MAX9601_I1_IN_1_3: length 8.8
  TOP w0.2: IC2_3.9 112.4,41.4 112.5,41.5 R6_3.2 R8_3.2
  TOP w0.4: 112.5,41.5 112.5,43.88 111.58,44.8 IC1_3.7
UNNAMED_1_MAX9601_I1_IN_1_4: length 8.8
  TOP w0.2: R8_4.2 R6_4.2 131.5,41.5 131.4,41.4 IC2_4.9
  TOP w0.4: IC1_4.7 130.57,44.8 131.5,43.88 131.5,41.5
UNNAMED_1_MAX9601_I1_IN_2: length 3.8
  TOP w0.2: R3_2.2 R7_2.2 89.45,43.45 90.06,42.84 90.11,42.84 IC2_2.10
UNNAMED_1_MAX9601_I1_IN_3: length 3.8
  TOP w0.2: R3_3.2 R7_3.2 108.45,43.45 109.06,42.84 109.11,42.84 IC2_3.10
UNNAMED_1_MAX9601_I1_IN_4: length 3.8
  TOP w0.2: IC2_4.10 128.11,42.84 128.06,42.84 127.45,43.45 R7_4.2 R3_4.2
UNNAMED_1_MAX9601_I1_Q_1: length 11.5
  TOP w0.2: R12_1.2 64.38,31.58 IC3_1.10 67.15,31.58
  TOP w0.4: 67.15,31.58 67.18,31.6 TP6_1.1 68.5,31.6 69.05,32.15 69.05,35.22 70.36,36.52 70.51,36.52 70.84,36.85 IC2_1.2
UNNAMED_1_MAX9601_I1_Q_1_1: length 10.9
  TOP w0.2: 72.45,31.58 IC3_1.7 75.17,31.58 R14_1.2
  TOP w0.4: IC2_1.1 71.2,36.2 69.85,34.85 69.85,32.2 70.45,31.6 TP5_1.1 72.42,31.6 72.45,31.58
UNNAMED_1_MAX9601_I1_Q_1_2: length 10.9
  TOP w0.2: 91.45,31.58 IC3_2.7 94.17,31.58 R14_2.2
  TOP w0.4: 91.45,31.58 91.42,31.6 TP5_2.1 89.45,31.6 88.85,32.2 88.85,34.85 90.2,36.2 IC2_2.1
UNNAMED_1_MAX9601_I1_Q_1_3: length 10.9
  TOP w0.2: R14_3.2 113.17,31.58 IC3_3.7 110.45,31.58
  TOP w0.4: 110.45,31.58 110.42,31.6 TP5_3.1 108.45,31.6 107.85,32.2 107.85,34.85 109.2,36.2 IC2_3.1
UNNAMED_1_MAX9601_I1_Q_1_4: length 10.9
  TOP w0.2: R14_4.2 132.18,31.58 IC3_4.7 129.45,31.58
  TOP w0.4: IC2_4.1 128.2,36.2 126.85,34.85 126.85,32.2 127.45,31.6 TP5_4.1 129.42,31.6 129.45,31.58
UNNAMED_1_MAX9601_I1_Q_2: length 11.5
  TOP w0.2: 86.15,31.58 IC3_2.10 83.38,31.58 R12_2.2
  TOP w0.4: IC2_2.2 89.84,36.85 89.51,36.52 89.36,36.52 88.05,35.22 88.05,32.15 87.5,31.6 TP6_2.1 86.18,31.6 86.15,31.58
UNNAMED_1_MAX9601_I1_Q_3: length 11.5
  TOP w0.2: R12_3.2 102.38,31.58 IC3_3.10 105.15,31.58
  TOP w0.4: 105.15,31.58 105.18,31.6 TP6_3.1 106.5,31.6 107.05,32.15 107.05,35.22 108.36,36.52 108.51,36.52 108.84,36.85 IC2_3.2
UNNAMED_1_MAX9601_I1_Q_4: length 11.5
  TOP w0.2: 124.15,31.58 IC3_4.10 121.38,31.58 R12_4.2
  TOP w0.4: IC2_4.2 127.84,36.85 127.51,36.52 127.36,36.52 126.05,35.22 126.05,32.15 125.5,31.6 TP6_4.1 124.18,31.6 124.15,31.58
